# EAGLE board Qwiic_Pocket_Dev_ESP32_C6-Panel (EAGLE 9.6.2), part 1 of 5
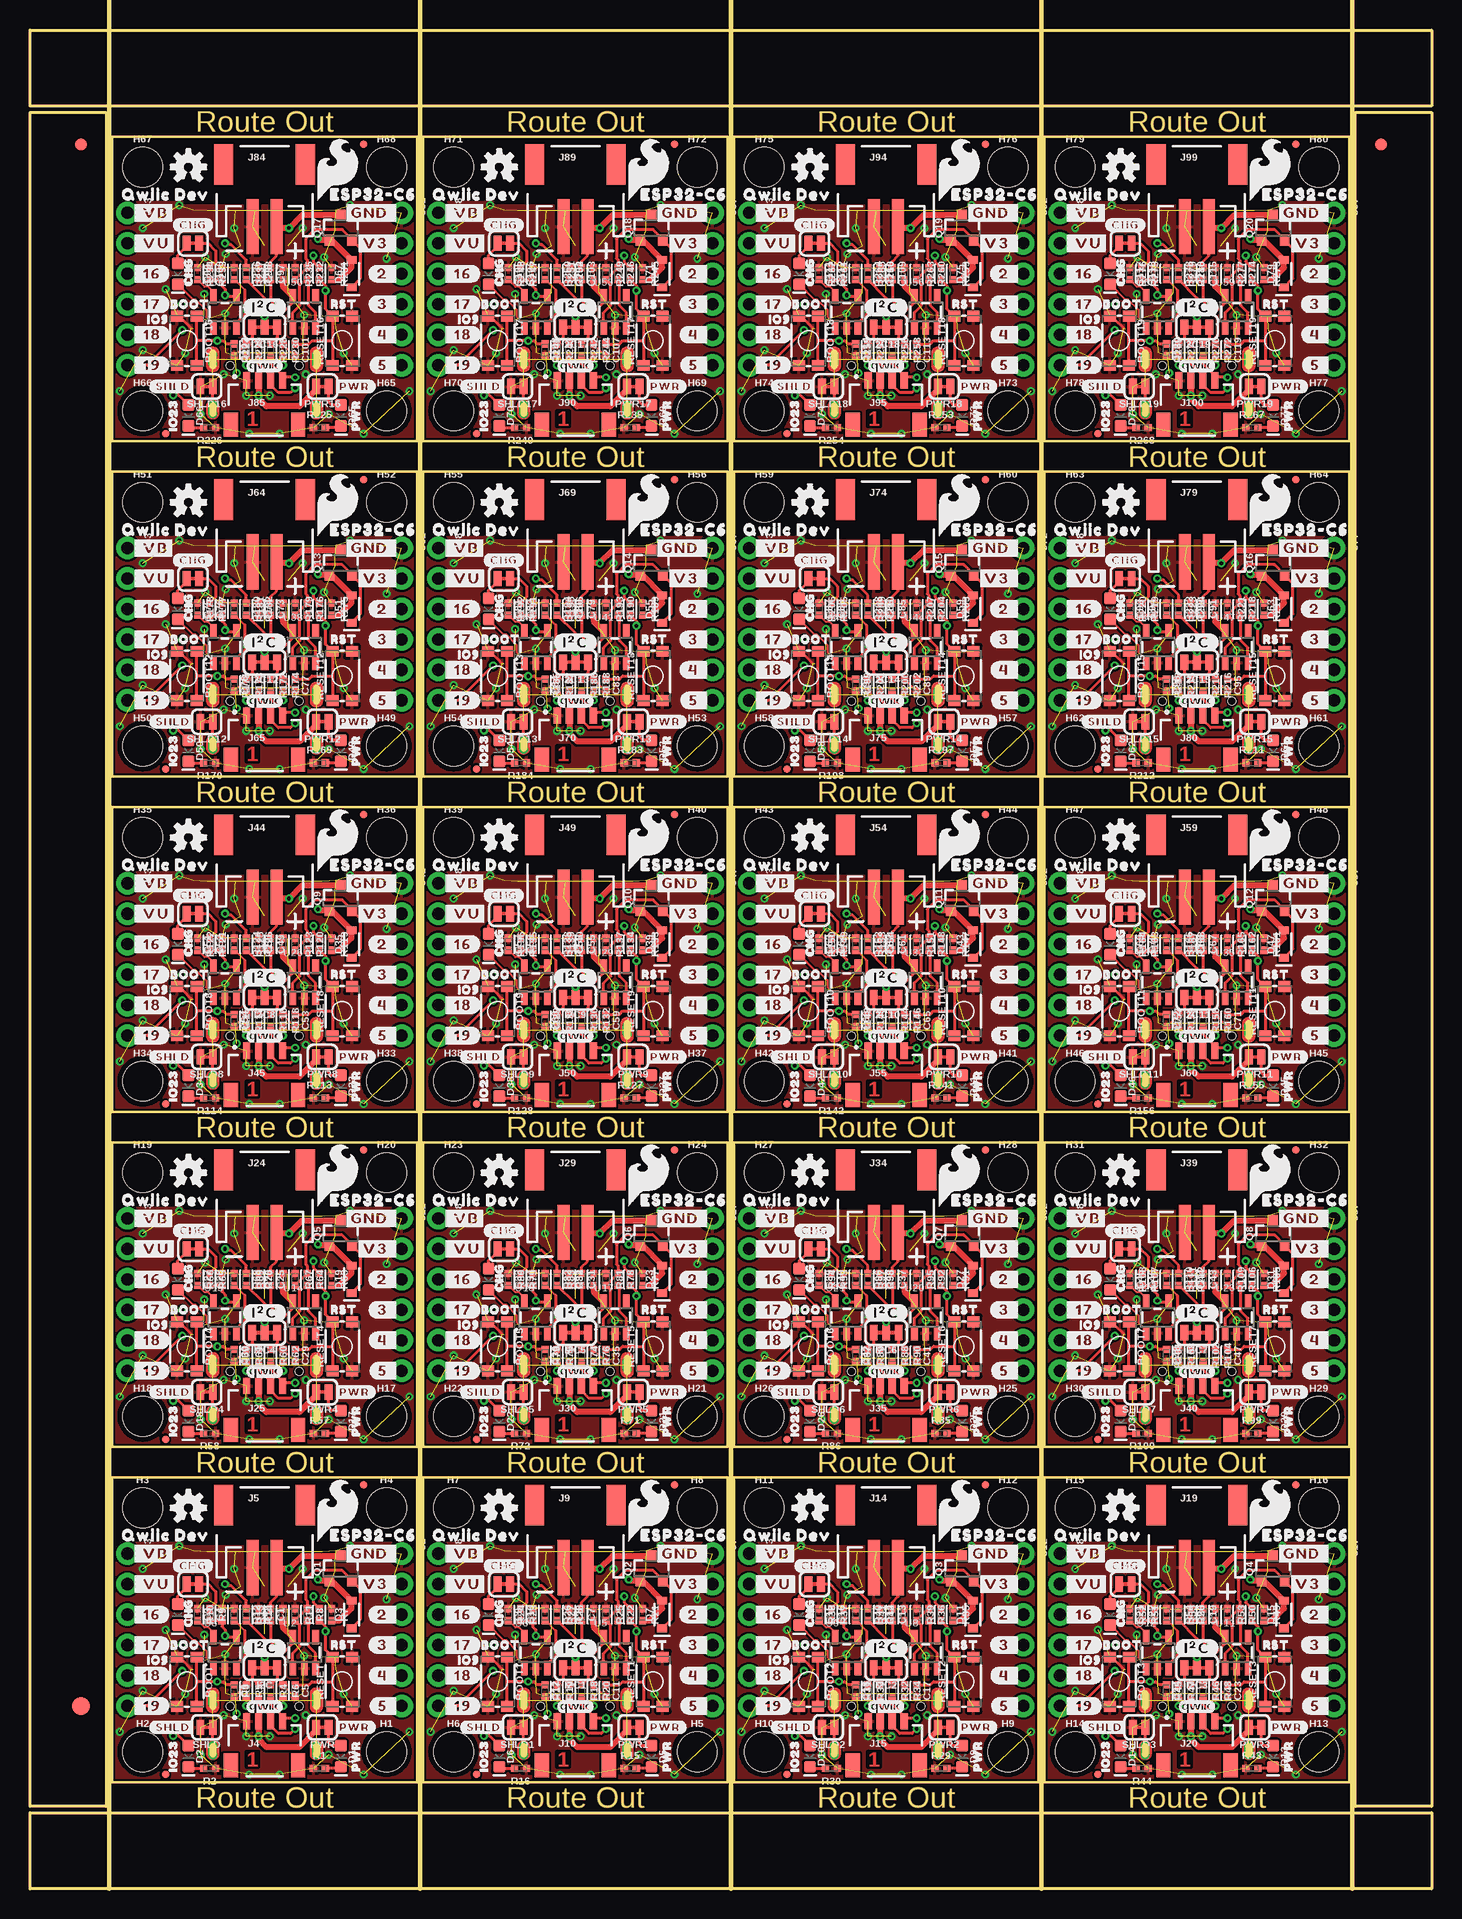
[diagram p0: board, top side]
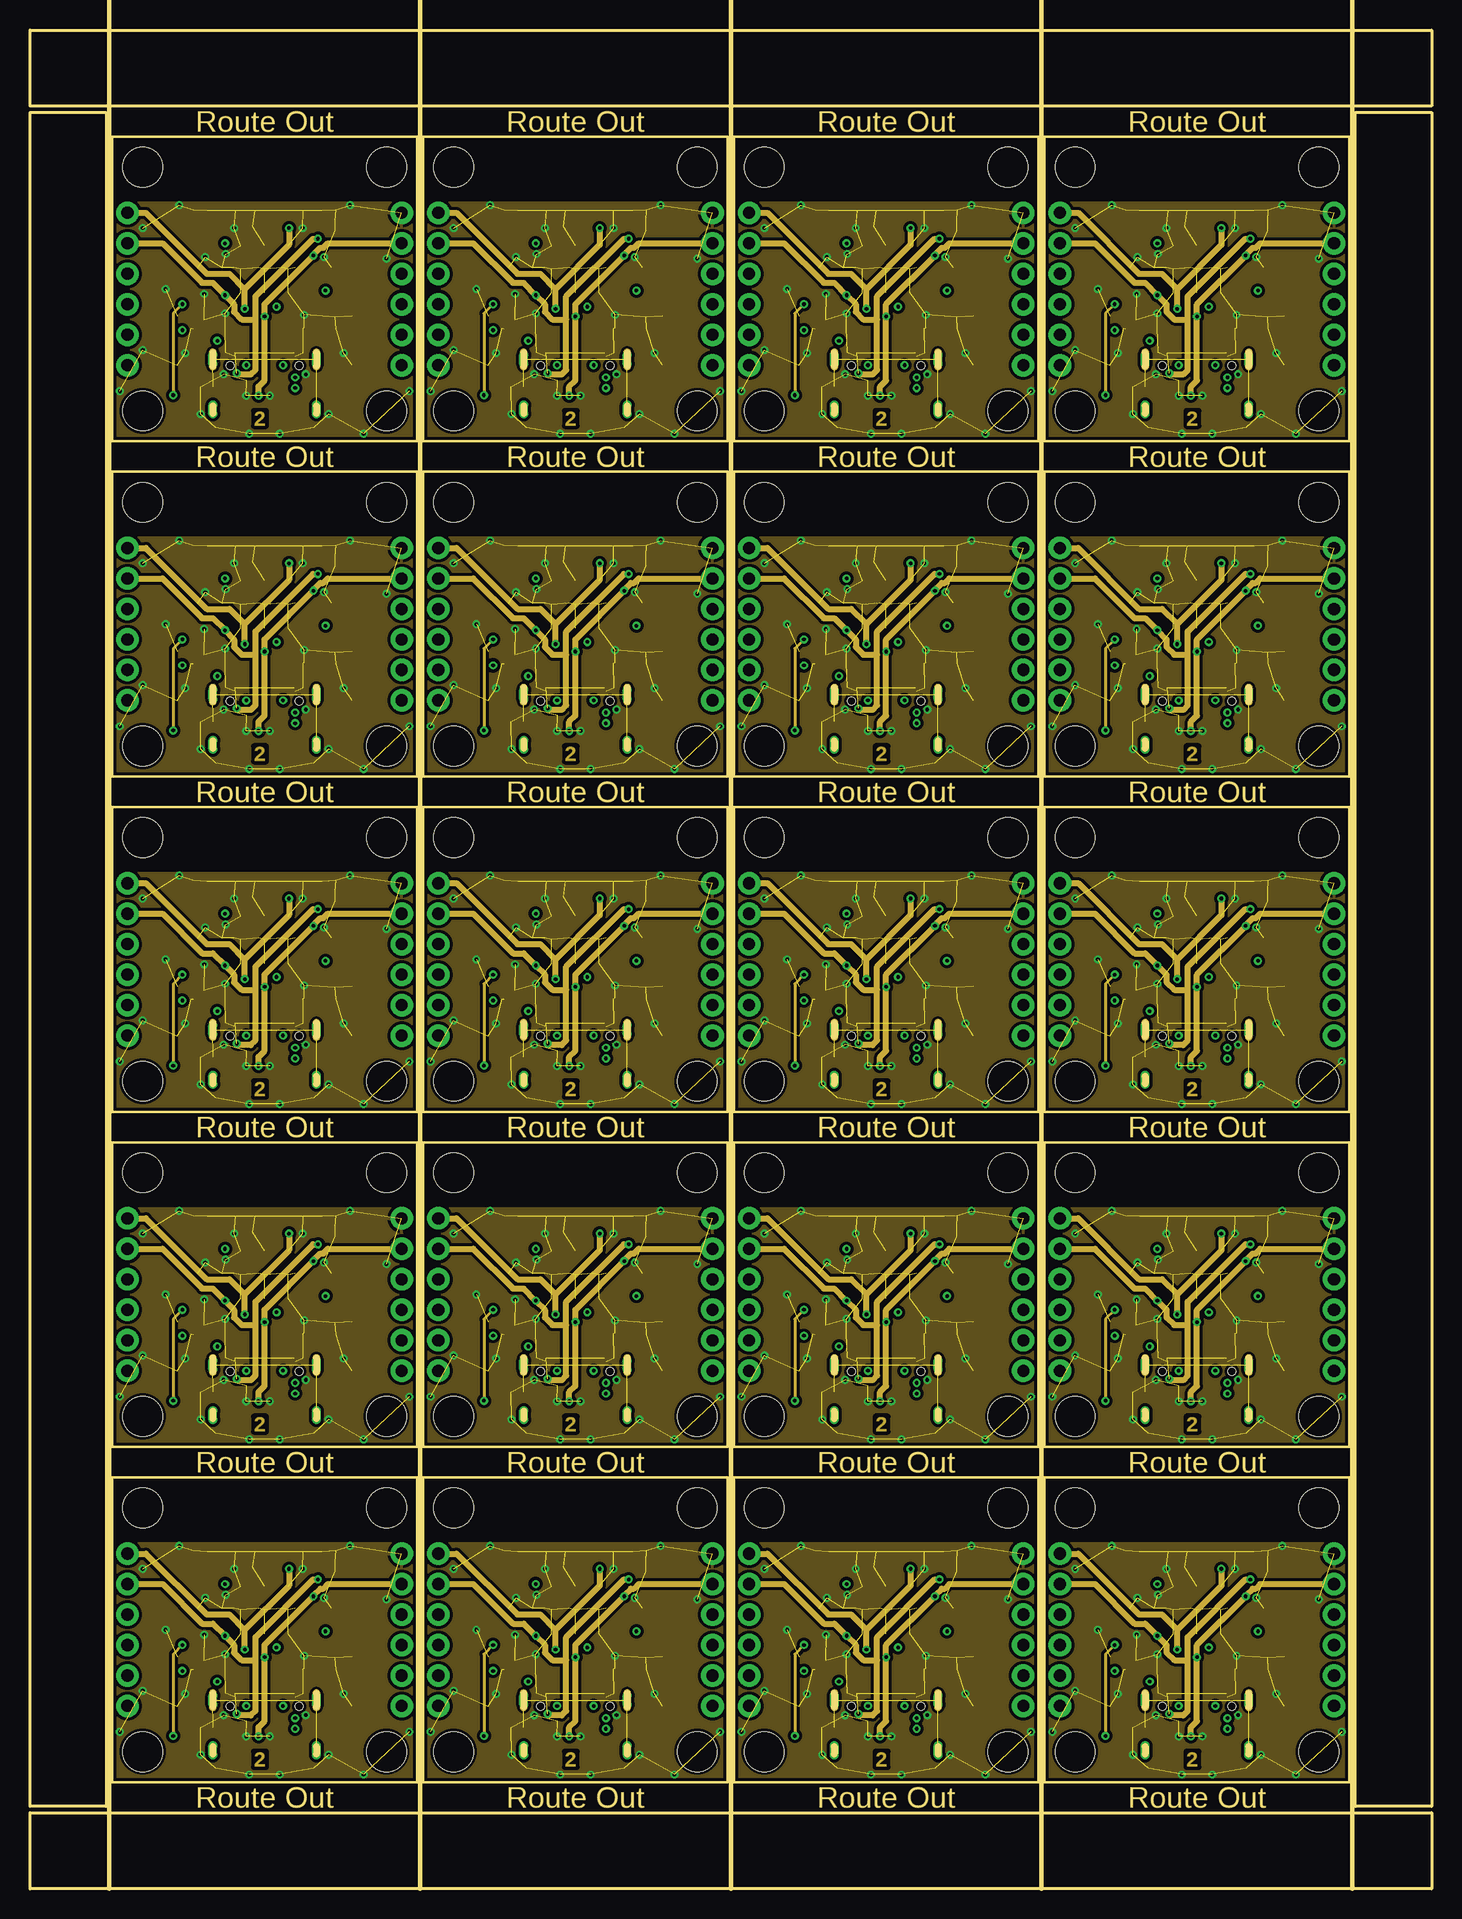
[diagram p1: board, inner layer Route2]
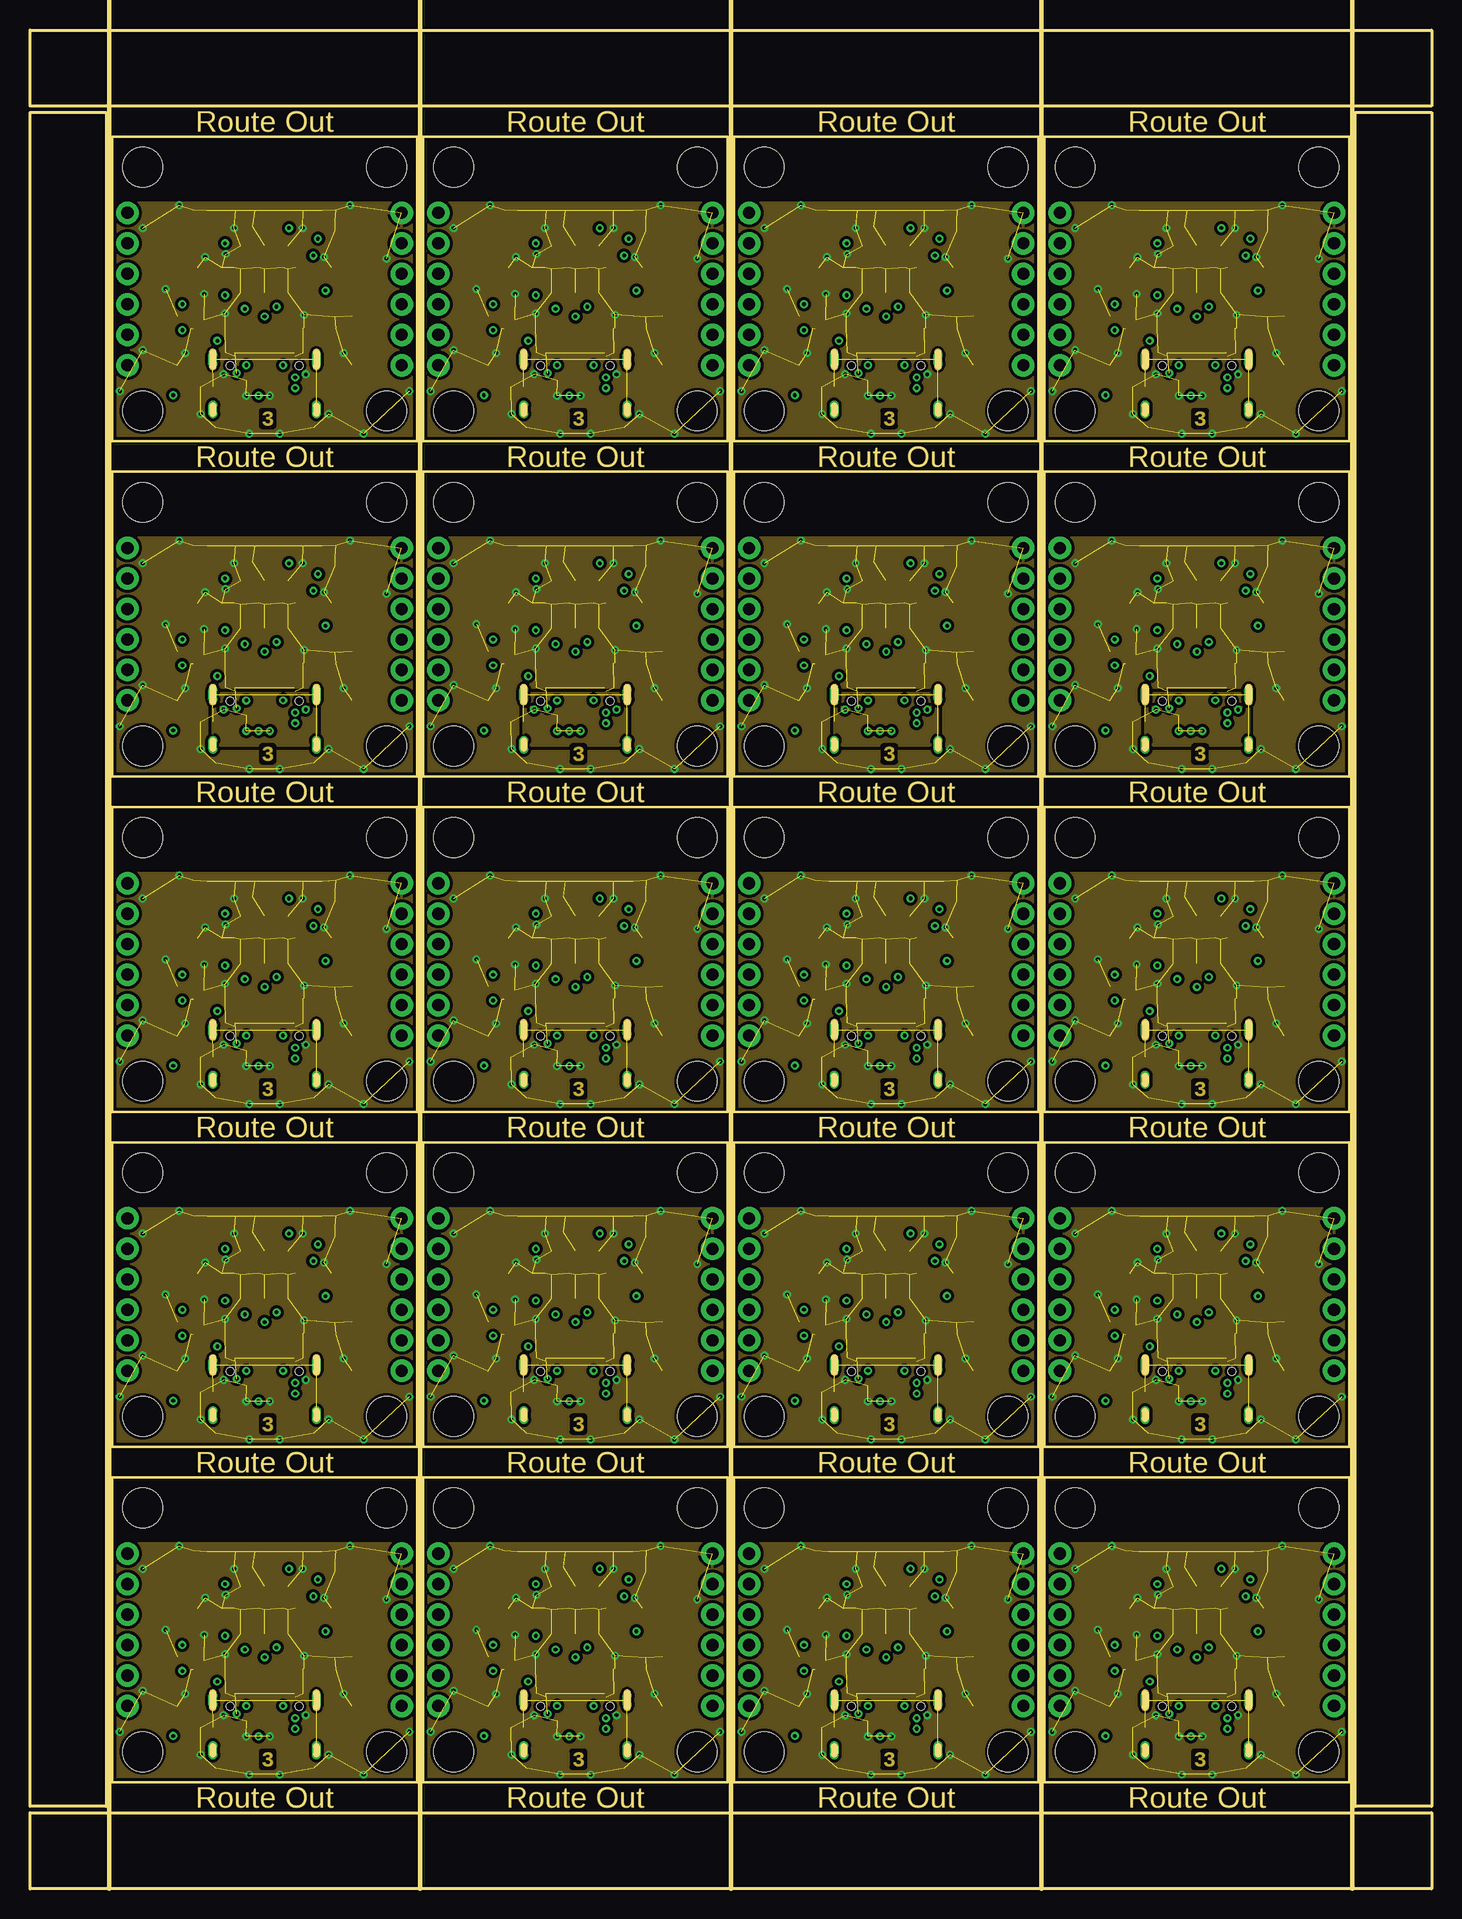
[diagram p2: board, inner layer Route15]
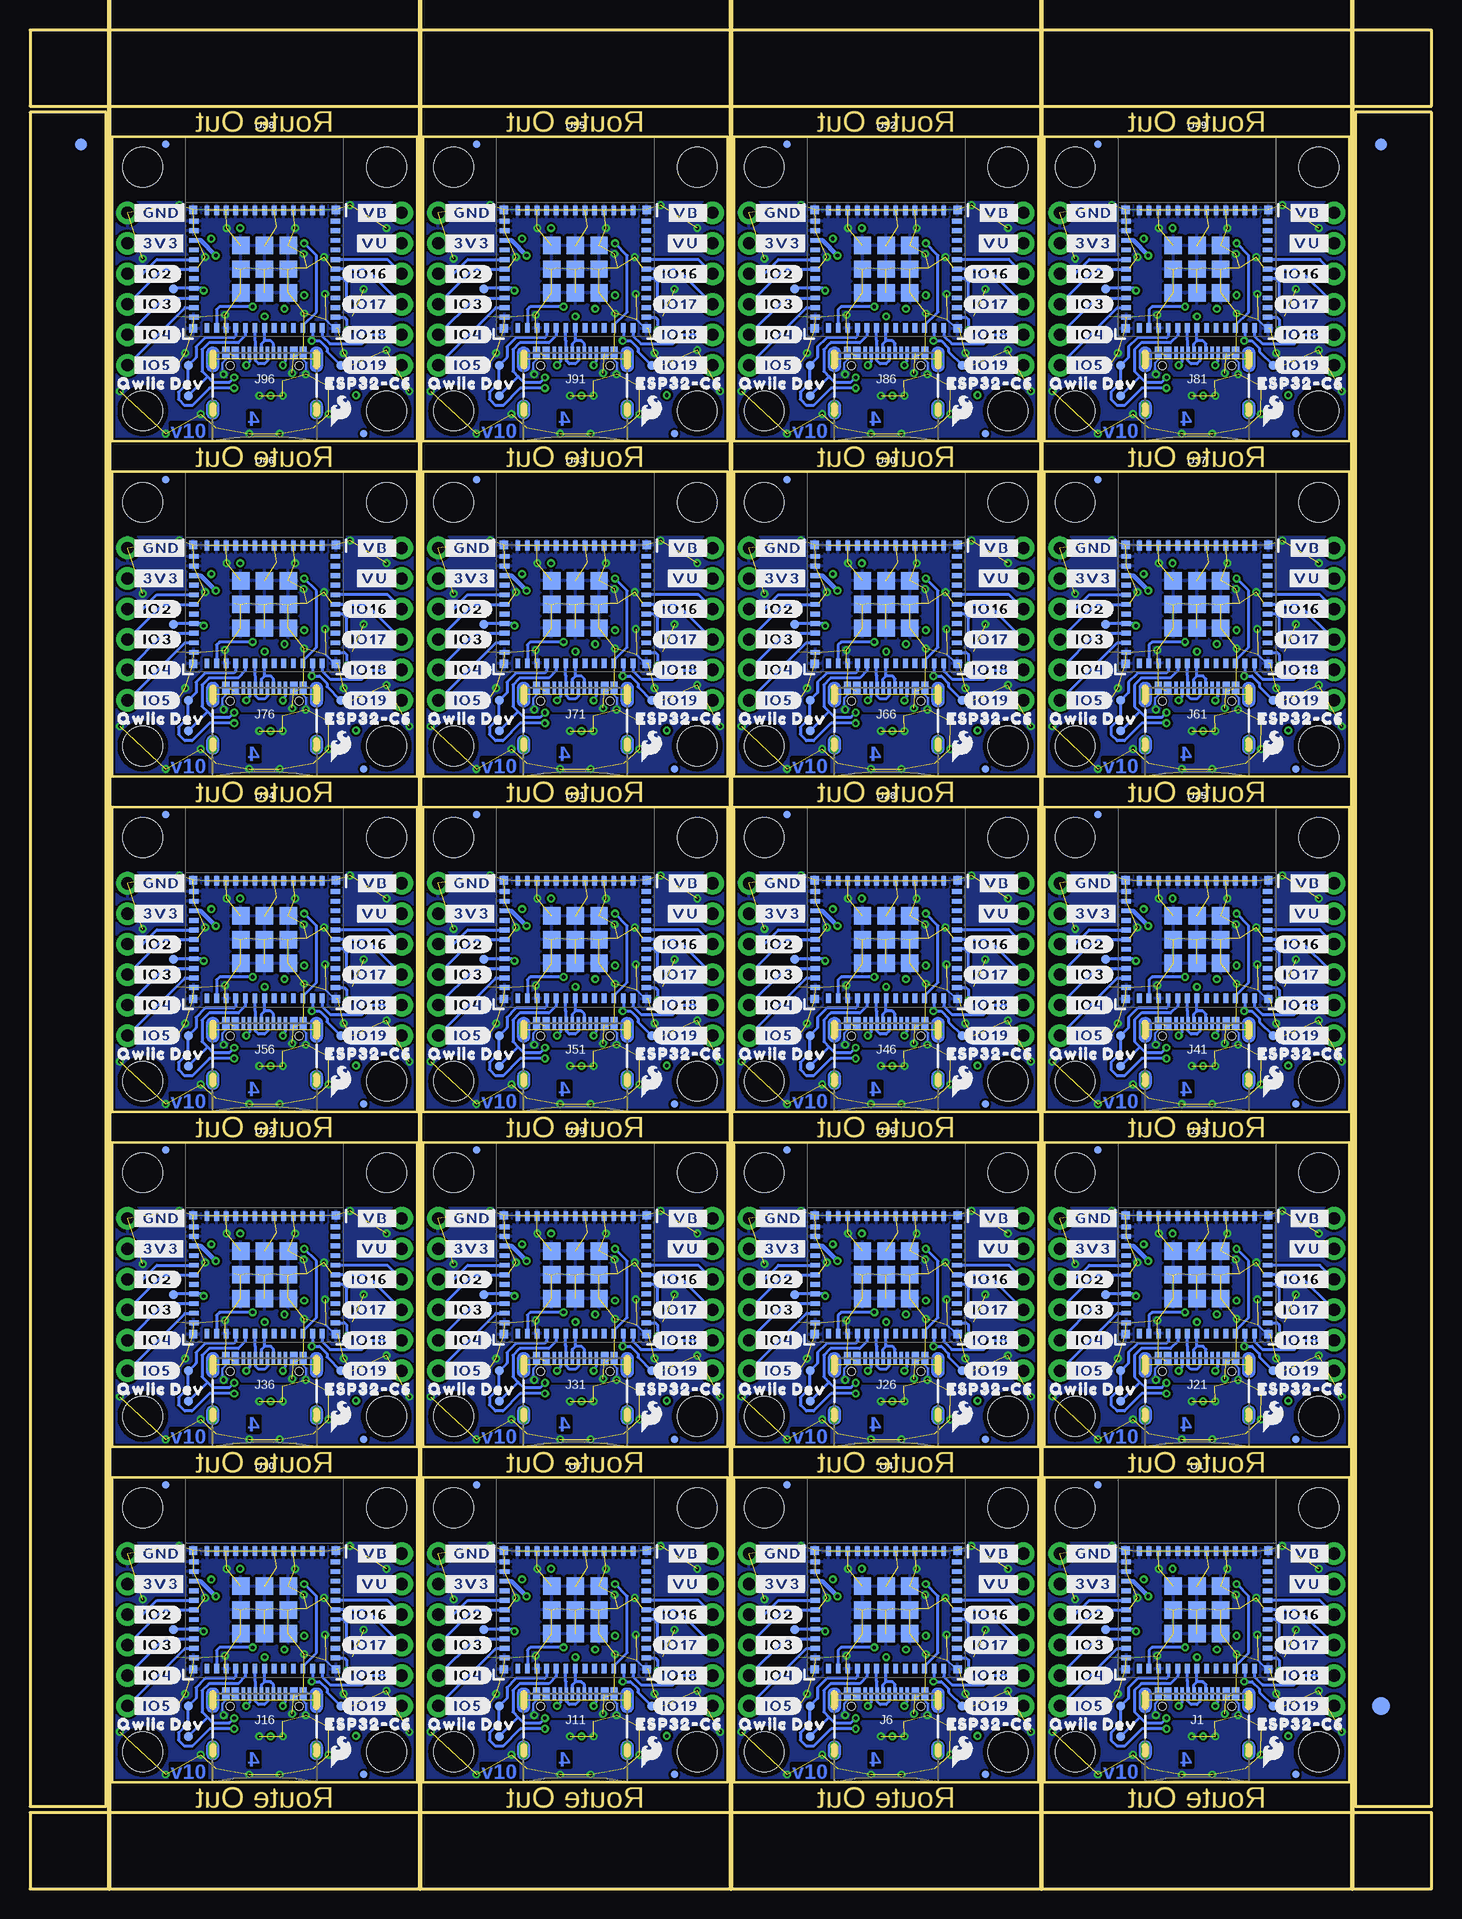
[diagram p3: board, bottom side, seen from below]

Size 116.84 x 154.94 mm. Coordinates in mm from the lower left corner, seen from the top.
Outline: 6.86,8.89 32.26,8.89 32.26,34.29 6.86,34.29 6.86,8.89
Outline: 32.77,8.89 58.17,8.89 58.17,34.29 32.77,34.29 32.77,8.89
Outline: 58.67,8.89 84.07,8.89 84.07,34.29 58.67,34.29 58.67,8.89
Outline: 84.58,8.89 109.98,8.89 109.98,34.29 84.58,34.29 84.58,8.89
Outline: 6.86,36.83 32.26,36.83 32.26,62.23 6.86,62.23 6.86,36.83
Outline: 32.77,36.83 58.17,36.83 58.17,62.23 32.77,62.23 32.77,36.83
Outline: 58.67,36.83 84.07,36.83 84.07,62.23 58.67,62.23 58.67,36.83
Outline: 84.58,36.83 109.98,36.83 109.98,62.23 84.58,62.23 84.58,36.83
Outline: 6.86,64.77 32.26,64.77 32.26,90.17 6.86,90.17 6.86,64.77
Outline: 32.77,64.77 58.17,64.77 58.17,90.17 32.77,90.17 32.77,64.77
Outline: 58.67,64.77 84.07,64.77 84.07,90.17 58.67,90.17 58.67,64.77
Outline: 84.58,64.77 109.98,64.77 109.98,90.17 84.58,90.17 84.58,64.77
Outline: 6.86,92.71 32.26,92.71 32.26,118.11 6.86,118.11 6.86,92.71
Outline: 32.77,92.71 58.17,92.71 58.17,118.11 32.77,118.11 32.77,92.71
Outline: 58.67,92.71 84.07,92.71 84.07,118.11 58.67,118.11 58.67,92.71
Outline: 84.58,92.71 109.98,92.71 109.98,118.11 84.58,118.11 84.58,92.71
Outline: 6.86,120.65 32.26,120.65 32.26,146.05 6.86,146.05 6.86,120.65
Outline: 32.77,120.65 58.17,120.65 58.17,146.05 32.77,146.05 32.77,120.65
Outline: 58.67,120.65 84.07,120.65 84.07,146.05 58.67,146.05 58.67,120.65
Outline: 84.58,120.65 109.98,120.65 109.98,146.05 84.58,146.05 84.58,120.65
Outline: 0,6.35 116.84,6.35 116.84,0 0,0 0,6.35
Outline: 110.49,148.08 116.84,148.08 116.84,6.86 110.49,6.86 110.49,148.08
Outline: 0,154.94 116.84,154.94 116.84,148.59 0,148.59 0,154.94
Outline: 0,148.08 6.35,148.08 6.35,6.86 0,6.86 0,148.08
Copper layers (1+2*15+16): Top 0.035559375mm / dielectric 0.47751875mm / Route2 0.035559375mm / dielectric 0.47751875mm / Route15 0.035559375mm / dielectric 0.47751875mm / Bottom 0.035559375mm
Design rules "Qwiic_Pocket_Dev_ESP32_C6": minimum track width 7mil, minimum drill 12mil, track to track 7mil, track to pad 7mil, pad to pad 7mil, via to via 7mil, smd to smd 7mil, copper to edge 7mil, drill to drill 7mil, minimum pad ring 7mil, minimum via ring 7mil, stop-mask expansion 3mil, vias tented up to drill 25mil, thermal gap 10mil
tRestrict: area 25.9,28.4 to 26.2,28.7; area 51.8,28.4 to 52.1,28.7; area 77.7,28.4 to 78,28.7; area 103.6,28.4 to 103.9,28.7; area 25.9,56.4 to 26.2,56.6; area 51.8,56.4 to 52.1,56.6; area 77.7,56.4 to 78,56.6; area 103.6,56.4 to 103.9,56.6; area 25.9,84.3 to 26.2,84.6; area 51.8,84.3 to 52.1,84.6; area 77.7,84.3 to 78,84.6; area 103.6,84.3 to 103.9,84.6; area 25.9,112.3 to 26.2,112.5; area 51.8,112.3 to 52.1,112.5; area 77.7,112.3 to 78,112.5; area 103.6,112.3 to 103.9,112.5; area 25.9,140.2 to 26.2,140.5; area 51.8,140.2 to 52.1,140.5; area 77.7,140.2 to 78,140.5; area 103.6,140.2 to 103.9,140.5
bRestrict: area 16.3,17 to 16.5,17.3; area 42.2,17 to 42.4,17.3; area 68.1,17 to 68.3,17.3; area 94,17 to 94.2,17.3; area 16.3,45 to 16.5,45.2; area 42.2,45 to 42.4,45.2; area 68.1,45 to 68.3,45.2; area 94,45 to 94.2,45.2; area 16.3,72.9 to 16.5,73.2; area 42.2,72.9 to 42.4,73.2; area 68.1,72.9 to 68.3,73.2; area 94,72.9 to 94.2,73.2; area 16.3,100.8 to 16.5,101.1; area 42.2,100.8 to 42.4,101.1; area 68.1,100.8 to 68.3,101.1; area 94,100.8 to 94.2,101.1; area 16.3,128.8 to 16.5,129; area 42.2,128.8 to 42.4,129; area 68.1,128.8 to 68.3,129; area 94,128.8 to 94.2,129
Milling: 5 lines

## Footprints (pad centres in the part's own frame; a part is rotated, then mirrored left to right if it is on the bottom)
TACTILE_SWITCH_SMD_4.6X2.8MM = smd 0.9 x 1: 1 -2.05,-0.8; 2 2.05,-0.8; 3 2.05,0.8; 4 -2.05,0.8
0402-TIGHT = smd 0.6 x 0.6: 1 -0.5,0; 2 0.5,0
SMT-JUMPER_2_NC_TRACE_SILK = smd 0.66 x 1.27: 1 -0.521,0; 2 0.521,0
LED-0603 = smd 1 x 1: A -0.877,0; C 0.877,0
SOD-323 = smd 0.63 x 0.83: A 1.15,0; C -1.15,0
FIDUCIAL-1X2 = smd 1 x 1: 1 0,0
FIDUCIAL-1.5X3 = smd 1.5 x 1.5: 1 0,0
FIDUCIAL-MICRO = smd 0.635 x 0.635: 1 0,0
STAND-OFF = hole 3.302: 0,0
SMT-JUMPER_3_2-NC_TRACE_SILK = smd 0.66 x 1.27: 1 -1.041,0; 2 0,0; 3 1.041,0
USB-C-16P_4LAYER-PADS = smd 0.3 x 1: A5 -1.25,-0.34; A6 -0.25,-0.34; A7 0.25,-0.34; A8 1.25,-0.34; B5 1.75,-0.34; B6 0.75,-0.34; B7 -0.75,-0.34; B8 -1.75,-0.34 | smd 0.6 x 1: GND -3.225,-0.34; GND2 3.225,-0.34; VBUS1 -2.45,-0.34; VBUS2 2.45,-0.34 | drill 0.4 pad 0.6 long: SHLD1 -4.318,-0.915; SHLD2 4.318,-0.915; SHLD3 -4.318,-5.095; SHLD4 4.318,-5.095 | hole 0.65: -2.89,-1.445; 2.89,-1.445
1X06_NO_SILK = drill 1.016 pad 1.88: 1 0,0; 2 2.54,0; 3 5.08,0; 4 7.62,0; 5 10.16,0; 6 12.7,0
JST04_1MM_RA = smd 0.6 x 1.35: 1 -1.5,0; 2 -0.5,0; 3 0.5,0; 4 1.5,0 | smd 1.2 x 2: NC1 2.8,-3.675; NC2 -2.8,-3.675
JST-2-SMD = smd 1 x 4.6: 1 -1,-3.7; 2 1,-3.7 | smd 1.6 x 3.4: NC1 -3.4,1.5; NC2 3.4,1.5
SOT23-3 = smd 0.8 x 0.9: 1 -0.95,-1; 2 0.95,-1; 3 0,1.1
PAD.03X.03 = smd 0.762 x 0.762: 1 0,0
ESP32-C6-MINI-1 = smd 0.8 x 0.4: 1 -5.9,4; 2 -5.9,3.2; 3 -5.9,2.4; 4 -5.9,1.6; 5 -5.9,0.8; 6 -5.9,0; 7 -5.9,-0.8; 8 -5.9,-1.6; 9 -5.9,-2.4; 10 -5.9,-3.2; 11 -5.9,-4; 25 5.9,-4; 26 5.9,-3.2; 27 5.9,-2.4; 28 5.9,-1.6; 29 5.9,-0.8; 30 5.9,0; 31 5.9,0.8; 32 5.9,1.6; 33 5.9,2.4; 34 5.9,3.2; 35 5.9,4 | smd 0.4 x 0.8: 12 -4.8,-4.9; 13 -4,-4.9; 14 -3.2,-4.9; 15 -2.4,-4.9; 16 -1.6,-4.9; 17 -0.8,-4.9; 18 0,-4.9; 19 0.8,-4.9; 20 1.6,-4.9; 21 2.4,-4.9; 22 3.2,-4.9; 23 4,-4.9; 24 4.8,-4.9; 36 4.8,4.9; 37 4,4.9; 38 3.2,4.9; 39 2.4,4.9; 40 1.6,4.9; 41 0.8,4.9; 42 0,4.9; 43 -0.8,4.9; 44 -1.6,4.9; 45 -2.4,4.9; 46 -3.2,4.9; 47 -4,4.9; 48 -4.8,4.9 | smd 1.45 x 1.45: 49.1 -1.975,1.975; 49.2 -1.975,0; 49.3 -1.975,-1.975; 49.4 0,-1.975; 49.5 1.975,-1.975; 49.6 1.975,0; 49.7 1.975,1.975; 49.8 0,1.975; 49.9 0,0 | smd 0.7 x 0.7: 50 5.95,4.95; 51 5.95,-4.95; 52 -5.95,-4.95; 53 -5.95,4.95
SOT23-5 = smd 0.55 x 1.2: 1 -0.95,-1.3; 2 0,-1.3; 3 0.95,-1.3; 4 0.95,1.3; 5 -0.95,1.3

## Placement (x,y rotation side)
BOOT  MOMENTARY-SWITCH-SPST-SMD-4.6X2.8MM  [TACTILE_SWITCH_SMD_4.6X2.8MM]  13.08,17.27 270 top
BOOT1  MOMENTARY-SWITCH-SPST-SMD-4.6X2.8MM  [TACTILE_SWITCH_SMD_4.6X2.8MM]  38.99,17.27 270 top
BOOT2  MOMENTARY-SWITCH-SPST-SMD-4.6X2.8MM  [TACTILE_SWITCH_SMD_4.6X2.8MM]  64.9,17.27 270 top
BOOT3  MOMENTARY-SWITCH-SPST-SMD-4.6X2.8MM  [TACTILE_SWITCH_SMD_4.6X2.8MM]  90.81,17.27 270 top
BOOT4  MOMENTARY-SWITCH-SPST-SMD-4.6X2.8MM  [TACTILE_SWITCH_SMD_4.6X2.8MM]  13.08,45.21 270 top
BOOT5  MOMENTARY-SWITCH-SPST-SMD-4.6X2.8MM  [TACTILE_SWITCH_SMD_4.6X2.8MM]  38.99,45.21 270 top
BOOT6  MOMENTARY-SWITCH-SPST-SMD-4.6X2.8MM  [TACTILE_SWITCH_SMD_4.6X2.8MM]  64.9,45.21 270 top
BOOT7  MOMENTARY-SWITCH-SPST-SMD-4.6X2.8MM  [TACTILE_SWITCH_SMD_4.6X2.8MM]  90.81,45.21 270 top
BOOT8  MOMENTARY-SWITCH-SPST-SMD-4.6X2.8MM  [TACTILE_SWITCH_SMD_4.6X2.8MM]  13.08,73.15 270 top
BOOT9  MOMENTARY-SWITCH-SPST-SMD-4.6X2.8MM  [TACTILE_SWITCH_SMD_4.6X2.8MM]  38.99,73.15 270 top
BOOT10  MOMENTARY-SWITCH-SPST-SMD-4.6X2.8MM  [TACTILE_SWITCH_SMD_4.6X2.8MM]  64.9,73.15 270 top
BOOT11  MOMENTARY-SWITCH-SPST-SMD-4.6X2.8MM  [TACTILE_SWITCH_SMD_4.6X2.8MM]  90.81,73.15 270 top
BOOT12  MOMENTARY-SWITCH-SPST-SMD-4.6X2.8MM  [TACTILE_SWITCH_SMD_4.6X2.8MM]  13.08,101.09 270 top
BOOT13  MOMENTARY-SWITCH-SPST-SMD-4.6X2.8MM  [TACTILE_SWITCH_SMD_4.6X2.8MM]  38.99,101.09 270 top
BOOT14  MOMENTARY-SWITCH-SPST-SMD-4.6X2.8MM  [TACTILE_SWITCH_SMD_4.6X2.8MM]  64.9,101.09 270 top
BOOT15  MOMENTARY-SWITCH-SPST-SMD-4.6X2.8MM  [TACTILE_SWITCH_SMD_4.6X2.8MM]  90.81,101.09 270 top
BOOT16  MOMENTARY-SWITCH-SPST-SMD-4.6X2.8MM  [TACTILE_SWITCH_SMD_4.6X2.8MM]  13.08,129.03 270 top
BOOT17  MOMENTARY-SWITCH-SPST-SMD-4.6X2.8MM  [TACTILE_SWITCH_SMD_4.6X2.8MM]  38.99,129.03 270 top
BOOT18  MOMENTARY-SWITCH-SPST-SMD-4.6X2.8MM  [TACTILE_SWITCH_SMD_4.6X2.8MM]  64.9,129.03 270 top
BOOT19  MOMENTARY-SWITCH-SPST-SMD-4.6X2.8MM  [TACTILE_SWITCH_SMD_4.6X2.8MM]  90.81,129.03 270 top
C1  2.2uF  [0402-TIGHT]  22.1,22.86 90 top
C2  2.2uF  [0402-TIGHT]  21.08,22.86 90 top
C3  2.2uF  [0402-TIGHT]  16,22.86 90 top
C4  2.2uF  [0402-TIGHT]  17.02,22.86 90 top
C5  0.1uF  [0402-TIGHT]  22.1,16.51 270 top
C6  DNP  [0402-TIGHT]  17.02,16.51 270 top
C7  2.2uF  [0402-TIGHT]  48.01,22.86 90 top
C8  2.2uF  [0402-TIGHT]  46.99,22.86 90 top
C9  2.2uF  [0402-TIGHT]  41.91,22.86 90 top
C10  2.2uF  [0402-TIGHT]  42.93,22.86 90 top
C11  0.1uF  [0402-TIGHT]  48.01,16.51 270 top
C12  DNP  [0402-TIGHT]  42.93,16.51 270 top
C13  2.2uF  [0402-TIGHT]  73.91,22.86 90 top
C14  2.2uF  [0402-TIGHT]  72.9,22.86 90 top
C15  2.2uF  [0402-TIGHT]  67.82,22.86 90 top
C16  2.2uF  [0402-TIGHT]  68.83,22.86 90 top
C17  0.1uF  [0402-TIGHT]  73.91,16.51 270 top
C18  DNP  [0402-TIGHT]  68.83,16.51 270 top
C19  2.2uF  [0402-TIGHT]  99.82,22.86 90 top
C20  2.2uF  [0402-TIGHT]  98.81,22.86 90 top
C21  2.2uF  [0402-TIGHT]  93.73,22.86 90 top
C22  2.2uF  [0402-TIGHT]  94.74,22.86 90 top
C23  0.1uF  [0402-TIGHT]  99.82,16.51 270 top
C24  DNP  [0402-TIGHT]  94.74,16.51 270 top
C25  2.2uF  [0402-TIGHT]  22.1,50.8 90 top
C26  2.2uF  [0402-TIGHT]  21.08,50.8 90 top
C27  2.2uF  [0402-TIGHT]  16,50.8 90 top
C28  2.2uF  [0402-TIGHT]  17.02,50.8 90 top
C29  0.1uF  [0402-TIGHT]  22.1,44.45 270 top
C30  DNP  [0402-TIGHT]  17.02,44.45 270 top
C31  2.2uF  [0402-TIGHT]  48.01,50.8 90 top
C32  2.2uF  [0402-TIGHT]  46.99,50.8 90 top
C33  2.2uF  [0402-TIGHT]  41.91,50.8 90 top
C34  2.2uF  [0402-TIGHT]  42.93,50.8 90 top
C35  0.1uF  [0402-TIGHT]  48.01,44.45 270 top
C36  DNP  [0402-TIGHT]  42.93,44.45 270 top
C37  2.2uF  [0402-TIGHT]  73.91,50.8 90 top
C38  2.2uF  [0402-TIGHT]  72.9,50.8 90 top
C39  2.2uF  [0402-TIGHT]  67.82,50.8 90 top
C40  2.2uF  [0402-TIGHT]  68.83,50.8 90 top
C41  0.1uF  [0402-TIGHT]  73.91,44.45 270 top
C42  DNP  [0402-TIGHT]  68.83,44.45 270 top
C43  2.2uF  [0402-TIGHT]  99.82,50.8 90 top
C44  2.2uF  [0402-TIGHT]  98.81,50.8 90 top
C45  2.2uF  [0402-TIGHT]  93.73,50.8 90 top
C46  2.2uF  [0402-TIGHT]  94.74,50.8 90 top
C47  0.1uF  [0402-TIGHT]  99.82,44.45 270 top
C48  DNP  [0402-TIGHT]  94.74,44.45 270 top
C49  2.2uF  [0402-TIGHT]  22.1,78.74 90 top
C50  2.2uF  [0402-TIGHT]  21.08,78.74 90 top
C51  2.2uF  [0402-TIGHT]  16,78.74 90 top
C52  2.2uF  [0402-TIGHT]  17.02,78.74 90 top
C53  0.1uF  [0402-TIGHT]  22.1,72.39 270 top
C54  DNP  [0402-TIGHT]  17.02,72.39 270 top
C55  2.2uF  [0402-TIGHT]  48.01,78.74 90 top
C56  2.2uF  [0402-TIGHT]  46.99,78.74 90 top
C57  2.2uF  [0402-TIGHT]  41.91,78.74 90 top
C58  2.2uF  [0402-TIGHT]  42.93,78.74 90 top
C59  0.1uF  [0402-TIGHT]  48.01,72.39 270 top
C60  DNP  [0402-TIGHT]  42.93,72.39 270 top
C61  2.2uF  [0402-TIGHT]  73.91,78.74 90 top
C62  2.2uF  [0402-TIGHT]  72.9,78.74 90 top
C63  2.2uF  [0402-TIGHT]  67.82,78.74 90 top
C64  2.2uF  [0402-TIGHT]  68.83,78.74 90 top
C65  0.1uF  [0402-TIGHT]  73.91,72.39 270 top
C66  DNP  [0402-TIGHT]  68.83,72.39 270 top
C67  2.2uF  [0402-TIGHT]  99.82,78.74 90 top
C68  2.2uF  [0402-TIGHT]  98.81,78.74 90 top
C69  2.2uF  [0402-TIGHT]  93.73,78.74 90 top
C70  2.2uF  [0402-TIGHT]  94.74,78.74 90 top
C71  0.1uF  [0402-TIGHT]  99.82,72.39 270 top
C72  DNP  [0402-TIGHT]  94.74,72.39 270 top
C73  2.2uF  [0402-TIGHT]  22.1,106.68 90 top
C74  2.2uF  [0402-TIGHT]  21.08,106.68 90 top
C75  2.2uF  [0402-TIGHT]  16,106.68 90 top
C76  2.2uF  [0402-TIGHT]  17.02,106.68 90 top
C77  0.1uF  [0402-TIGHT]  22.1,100.33 270 top
C78  DNP  [0402-TIGHT]  17.02,100.33 270 top
C79  2.2uF  [0402-TIGHT]  48.01,106.68 90 top
C80  2.2uF  [0402-TIGHT]  46.99,106.68 90 top
C81  2.2uF  [0402-TIGHT]  41.91,106.68 90 top
C82  2.2uF  [0402-TIGHT]  42.93,106.68 90 top
C83  0.1uF  [0402-TIGHT]  48.01,100.33 270 top
C84  DNP  [0402-TIGHT]  42.93,100.33 270 top
C85  2.2uF  [0402-TIGHT]  73.91,106.68 90 top
C86  2.2uF  [0402-TIGHT]  72.9,106.68 90 top
C87  2.2uF  [0402-TIGHT]  67.82,106.68 90 top
C88  2.2uF  [0402-TIGHT]  68.83,106.68 90 top
C89  0.1uF  [0402-TIGHT]  73.91,100.33 270 top
C90  DNP  [0402-TIGHT]  68.83,100.33 270 top
C91  2.2uF  [0402-TIGHT]  99.82,106.68 90 top
C92  2.2uF  [0402-TIGHT]  98.81,106.68 90 top
C93  2.2uF  [0402-TIGHT]  93.73,106.68 90 top
C94  2.2uF  [0402-TIGHT]  94.74,106.68 90 top
C95  0.1uF  [0402-TIGHT]  99.82,100.33 270 top
C96  DNP  [0402-TIGHT]  94.74,100.33 270 top
C97  2.2uF  [0402-TIGHT]  22.1,134.62 90 top
C98  2.2uF  [0402-TIGHT]  21.08,134.62 90 top
C99  2.2uF  [0402-TIGHT]  16,134.62 90 top
C100  2.2uF  [0402-TIGHT]  17.02,134.62 90 top
C101  0.1uF  [0402-TIGHT]  22.1,128.27 270 top
C102  DNP  [0402-TIGHT]  17.02,128.27 270 top
C103  2.2uF  [0402-TIGHT]  48.01,134.62 90 top
C104  2.2uF  [0402-TIGHT]  46.99,134.62 90 top
C105  2.2uF  [0402-TIGHT]  41.91,134.62 90 top
C106  2.2uF  [0402-TIGHT]  42.93,134.62 90 top
C107  0.1uF  [0402-TIGHT]  48.01,128.27 270 top
C108  DNP  [0402-TIGHT]  42.93,128.27 270 top
C109  2.2uF  [0402-TIGHT]  73.91,134.62 90 top
C110  2.2uF  [0402-TIGHT]  72.9,134.62 90 top
C111  2.2uF  [0402-TIGHT]  67.82,134.62 90 top
C112  2.2uF  [0402-TIGHT]  68.83,134.62 90 top
C113  0.1uF  [0402-TIGHT]  73.91,128.27 270 top
C114  DNP  [0402-TIGHT]  68.83,128.27 270 top
C115  2.2uF  [0402-TIGHT]  99.82,134.62 90 top
C116  2.2uF  [0402-TIGHT]  98.81,134.62 90 top
C117  2.2uF  [0402-TIGHT]  93.73,134.62 90 top
C118  2.2uF  [0402-TIGHT]  94.74,134.62 90 top
C119  0.1uF  [0402-TIGHT]  99.82,128.27 270 top
C120  DNP  [0402-TIGHT]  94.74,128.27 270 top
CHG  JUMPER-SMT_2_NC_TRACE_SILK  [SMT-JUMPER_2_NC_TRACE_SILK]  13.59,25.4 0 top
CHG1  JUMPER-SMT_2_NC_TRACE_SILK  [SMT-JUMPER_2_NC_TRACE_SILK]  39.5,25.4 0 top
CHG2  JUMPER-SMT_2_NC_TRACE_SILK  [SMT-JUMPER_2_NC_TRACE_SILK]  65.41,25.4 0 top
CHG3  JUMPER-SMT_2_NC_TRACE_SILK  [SMT-JUMPER_2_NC_TRACE_SILK]  91.31,25.4 0 top
CHG4  JUMPER-SMT_2_NC_TRACE_SILK  [SMT-JUMPER_2_NC_TRACE_SILK]  13.59,53.34 0 top
CHG5  JUMPER-SMT_2_NC_TRACE_SILK  [SMT-JUMPER_2_NC_TRACE_SILK]  39.5,53.34 0 top
CHG6  JUMPER-SMT_2_NC_TRACE_SILK  [SMT-JUMPER_2_NC_TRACE_SILK]  65.41,53.34 0 top
CHG7  JUMPER-SMT_2_NC_TRACE_SILK  [SMT-JUMPER_2_NC_TRACE_SILK]  91.31,53.34 0 top
CHG8  JUMPER-SMT_2_NC_TRACE_SILK  [SMT-JUMPER_2_NC_TRACE_SILK]  13.59,81.28 0 top
CHG9  JUMPER-SMT_2_NC_TRACE_SILK  [SMT-JUMPER_2_NC_TRACE_SILK]  39.5,81.28 0 top
CHG10  JUMPER-SMT_2_NC_TRACE_SILK  [SMT-JUMPER_2_NC_TRACE_SILK]  65.41,81.28 0 top
CHG11  JUMPER-SMT_2_NC_TRACE_SILK  [SMT-JUMPER_2_NC_TRACE_SILK]  91.31,81.28 0 top
CHG12  JUMPER-SMT_2_NC_TRACE_SILK  [SMT-JUMPER_2_NC_TRACE_SILK]  13.59,109.22 0 top
CHG13  JUMPER-SMT_2_NC_TRACE_SILK  [SMT-JUMPER_2_NC_TRACE_SILK]  39.5,109.22 0 top
CHG14  JUMPER-SMT_2_NC_TRACE_SILK  [SMT-JUMPER_2_NC_TRACE_SILK]  65.41,109.22 0 top
CHG15  JUMPER-SMT_2_NC_TRACE_SILK  [SMT-JUMPER_2_NC_TRACE_SILK]  91.31,109.22 0 top
CHG16  JUMPER-SMT_2_NC_TRACE_SILK  [SMT-JUMPER_2_NC_TRACE_SILK]  13.59,137.16 0 top
CHG17  JUMPER-SMT_2_NC_TRACE_SILK  [SMT-JUMPER_2_NC_TRACE_SILK]  39.5,137.16 0 top
CHG18  JUMPER-SMT_2_NC_TRACE_SILK  [SMT-JUMPER_2_NC_TRACE_SILK]  65.41,137.16 0 top
CHG19  JUMPER-SMT_2_NC_TRACE_SILK  [SMT-JUMPER_2_NC_TRACE_SILK]  91.31,137.16 0 top
D1  [LED-0603]  25.91,11.05 270 top
D2  BLUE  [LED-0603]  13.21,11.05 270 top
D3  1A/23V/620mV  [SOD-323]  26.8,22.86 90 top
D4  Yellow  [LED-0603]  12.32,22.86 270 top
D5  [LED-0603]  51.82,11.05 270 top
D6  BLUE  [LED-0603]  39.12,11.05 270 top
D7  1A/23V/620mV  [SOD-323]  52.7,22.86 90 top
D8  Yellow  [LED-0603]  38.23,22.86 270 top
D9  [LED-0603]  77.72,11.05 270 top
D10  BLUE  [LED-0603]  65.02,11.05 270 top
D11  1A/23V/620mV  [SOD-323]  78.61,22.86 90 top
D12  Yellow  [LED-0603]  64.14,22.86 270 top
D13  [LED-0603]  103.63,11.05 270 top
D14  BLUE  [LED-0603]  90.93,11.05 270 top
D15  1A/23V/620mV  [SOD-323]  104.52,22.86 90 top
D16  Yellow  [LED-0603]  90.04,22.86 270 top
D17  [LED-0603]  25.91,38.99 270 top
D18  BLUE  [LED-0603]  13.21,38.99 270 top
D19  1A/23V/620mV  [SOD-323]  26.8,50.8 90 top
D20  Yellow  [LED-0603]  12.32,50.8 270 top
D21  [LED-0603]  51.82,38.99 270 top
D22  BLUE  [LED-0603]  39.12,38.99 270 top
D23  1A/23V/620mV  [SOD-323]  52.7,50.8 90 top
D24  Yellow  [LED-0603]  38.23,50.8 270 top
D25  [LED-0603]  77.72,38.99 270 top
D26  BLUE  [LED-0603]  65.02,38.99 270 top
D27  1A/23V/620mV  [SOD-323]  78.61,50.8 90 top
D28  Yellow  [LED-0603]  64.14,50.8 270 top
D29  [LED-0603]  103.63,38.99 270 top
D30  BLUE  [LED-0603]  90.93,38.99 270 top
D31  1A/23V/620mV  [SOD-323]  104.52,50.8 90 top
D32  Yellow  [LED-0603]  90.04,50.8 270 top
D33  [LED-0603]  25.91,66.93 270 top
D34  BLUE  [LED-0603]  13.21,66.93 270 top
D35  1A/23V/620mV  [SOD-323]  26.8,78.74 90 top
D36  Yellow  [LED-0603]  12.32,78.74 270 top
D37  [LED-0603]  51.82,66.93 270 top
D38  BLUE  [LED-0603]  39.12,66.93 270 top
D39  1A/23V/620mV  [SOD-323]  52.7,78.74 90 top
D40  Yellow  [LED-0603]  38.23,78.74 270 top
D41  [LED-0603]  77.72,66.93 270 top
D42  BLUE  [LED-0603]  65.02,66.93 270 top
D43  1A/23V/620mV  [SOD-323]  78.61,78.74 90 top
D44  Yellow  [LED-0603]  64.14,78.74 270 top
D45  [LED-0603]  103.63,66.93 270 top
D46  BLUE  [LED-0603]  90.93,66.93 270 top
D47  1A/23V/620mV  [SOD-323]  104.52,78.74 90 top
D48  Yellow  [LED-0603]  90.04,78.74 270 top
D49  [LED-0603]  25.91,94.87 270 top
D50  BLUE  [LED-0603]  13.21,94.87 270 top
D51  1A/23V/620mV  [SOD-323]  26.8,106.68 90 top
D52  Yellow  [LED-0603]  12.32,106.68 270 top
D53  [LED-0603]  51.82,94.87 270 top
D54  BLUE  [LED-0603]  39.12,94.87 270 top
D55  1A/23V/620mV  [SOD-323]  52.7,106.68 90 top
D56  Yellow  [LED-0603]  38.23,106.68 270 top
D57  [LED-0603]  77.72,94.87 270 top
D58  BLUE  [LED-0603]  65.02,94.87 270 top
D59  1A/23V/620mV  [SOD-323]  78.61,106.68 90 top
D60  Yellow  [LED-0603]  64.14,106.68 270 top
D61  [LED-0603]  103.63,94.87 270 top
D62  BLUE  [LED-0603]  90.93,94.87 270 top
D63  1A/23V/620mV  [SOD-323]  104.52,106.68 90 top
D64  Yellow  [LED-0603]  90.04,106.68 270 top
D65  [LED-0603]  25.91,122.81 270 top
D66  BLUE  [LED-0603]  13.21,122.81 270 top
D67  1A/23V/620mV  [SOD-323]  26.8,134.62 90 top
D68  Yellow  [LED-0603]  12.32,134.62 270 top
D69  [LED-0603]  51.82,122.81 270 top
D70  BLUE  [LED-0603]  39.12,122.81 270 top
D71  1A/23V/620mV  [SOD-323]  52.7,134.62 90 top
D72  Yellow  [LED-0603]  38.23,134.62 270 top
D73  [LED-0603]  77.72,122.81 270 top
D74  BLUE  [LED-0603]  65.02,122.81 270 top
D75  1A/23V/620mV  [SOD-323]  78.61,134.62 90 top
D76  Yellow  [LED-0603]  64.14,134.62 270 top
D77  [LED-0603]  103.63,122.81 270 top
D78  BLUE  [LED-0603]  90.93,122.81 270 top
D79  1A/23V/620mV  [SOD-323]  104.52,134.62 90 top
D80  Yellow  [LED-0603]  90.04,134.62 270 top
E$1  [FIDUCIAL-1X2]  4.23,145.42 0 top
E$2  [FIDUCIAL-1X2]  4.23,145.42 0 bottom
E$3  [FIDUCIAL-1X2]  112.61,145.42 0 top
E$4  [FIDUCIAL-1X2]  112.61,145.42 0 bottom
E$5  [FIDUCIAL-1.5X3]  4.23,15.24 0 top
E$6  [FIDUCIAL-1.5X3]  4.23,15.24 0 bottom
FD1  FIDUCIALUFIDUCIAL  [FIDUCIAL-MICRO]  27.81,33.66 0 bottom
FD2  FIDUCIALUFIDUCIAL  [FIDUCIAL-MICRO]  27.81,33.66 0 top
FD3  FIDUCIALUFIDUCIAL  [FIDUCIAL-MICRO]  11.3,9.53 0 bottom
FD4  FIDUCIALUFIDUCIAL  [FIDUCIAL-MICRO]  11.3,9.53 0 top
FD5  FIDUCIALUFIDUCIAL  [FIDUCIAL-MICRO]  53.72,33.66 0 bottom
FD6  FIDUCIALUFIDUCIAL  [FIDUCIAL-MICRO]  53.72,33.66 0 top
FD7  FIDUCIALUFIDUCIAL  [FIDUCIAL-MICRO]  37.21,9.53 0 bottom
FD8  FIDUCIALUFIDUCIAL  [FIDUCIAL-MICRO]  37.21,9.53 0 top
FD9  FIDUCIALUFIDUCIAL  [FIDUCIAL-MICRO]  79.63,33.66 0 bottom
FD10  FIDUCIALUFIDUCIAL  [FIDUCIAL-MICRO]  79.63,33.66 0 top
FD11  FIDUCIALUFIDUCIAL  [FIDUCIAL-MICRO]  63.12,9.53 0 bottom
FD12  FIDUCIALUFIDUCIAL  [FIDUCIAL-MICRO]  63.12,9.53 0 top
FD13  FIDUCIALUFIDUCIAL  [FIDUCIAL-MICRO]  105.54,33.66 0 bottom
FD14  FIDUCIALUFIDUCIAL  [FIDUCIAL-MICRO]  105.54,33.66 0 top
FD15  FIDUCIALUFIDUCIAL  [FIDUCIAL-MICRO]  89.03,9.53 0 bottom
FD16  FIDUCIALUFIDUCIAL  [FIDUCIAL-MICRO]  89.03,9.53 0 top
FD17  FIDUCIALUFIDUCIAL  [FIDUCIAL-MICRO]  27.81,61.59 0 bottom
FD18  FIDUCIALUFIDUCIAL  [FIDUCIAL-MICRO]  27.81,61.59 0 top
FD19  FIDUCIALUFIDUCIAL  [FIDUCIAL-MICRO]  11.3,37.47 0 bottom
FD20  FIDUCIALUFIDUCIAL  [FIDUCIAL-MICRO]  11.3,37.47 0 top
FD21  FIDUCIALUFIDUCIAL  [FIDUCIAL-MICRO]  53.72,61.59 0 bottom
FD22  FIDUCIALUFIDUCIAL  [FIDUCIAL-MICRO]  53.72,61.59 0 top
FD23  FIDUCIALUFIDUCIAL  [FIDUCIAL-MICRO]  37.21,37.47 0 bottom
FD24  FIDUCIALUFIDUCIAL  [FIDUCIAL-MICRO]  37.21,37.47 0 top
FD25  FIDUCIALUFIDUCIAL  [FIDUCIAL-MICRO]  79.63,61.59 0 bottom
FD26  FIDUCIALUFIDUCIAL  [FIDUCIAL-MICRO]  79.63,61.59 0 top
FD27  FIDUCIALUFIDUCIAL  [FIDUCIAL-MICRO]  63.12,37.47 0 bottom
FD28  FIDUCIALUFIDUCIAL  [FIDUCIAL-MICRO]  63.12,37.47 0 top
FD29  FIDUCIALUFIDUCIAL  [FIDUCIAL-MICRO]  105.54,61.59 0 bottom
FD30  FIDUCIALUFIDUCIAL  [FIDUCIAL-MICRO]  105.54,61.59 0 top
FD31  FIDUCIALUFIDUCIAL  [FIDUCIAL-MICRO]  89.03,37.47 0 bottom
FD32  FIDUCIALUFIDUCIAL  [FIDUCIAL-MICRO]  89.03,37.47 0 top
FD33  FIDUCIALUFIDUCIAL  [FIDUCIAL-MICRO]  27.81,89.53 0 bottom
FD34  FIDUCIALUFIDUCIAL  [FIDUCIAL-MICRO]  27.81,89.53 0 top
FD35  FIDUCIALUFIDUCIAL  [FIDUCIAL-MICRO]  11.3,65.41 0 bottom
FD36  FIDUCIALUFIDUCIAL  [FIDUCIAL-MICRO]  11.3,65.41 0 top
FD37  FIDUCIALUFIDUCIAL  [FIDUCIAL-MICRO]  53.72,89.53 0 bottom
FD38  FIDUCIALUFIDUCIAL  [FIDUCIAL-MICRO]  53.72,89.53 0 top
FD39  FIDUCIALUFIDUCIAL  [FIDUCIAL-MICRO]  37.21,65.41 0 bottom
FD40  FIDUCIALUFIDUCIAL  [FIDUCIAL-MICRO]  37.21,65.41 0 top
FD41  FIDUCIALUFIDUCIAL  [FIDUCIAL-MICRO]  79.63,89.53 0 bottom
FD42  FIDUCIALUFIDUCIAL  [FIDUCIAL-MICRO]  79.63,89.53 0 top
FD43  FIDUCIALUFIDUCIAL  [FIDUCIAL-MICRO]  63.12,65.41 0 bottom
FD44  FIDUCIALUFIDUCIAL  [FIDUCIAL-MICRO]  63.12,65.41 0 top
FD45  FIDUCIALUFIDUCIAL  [FIDUCIAL-MICRO]  105.54,89.53 0 bottom
FD46  FIDUCIALUFIDUCIAL  [FIDUCIAL-MICRO]  105.54,89.53 0 top
FD47  FIDUCIALUFIDUCIAL  [FIDUCIAL-MICRO]  89.03,65.41 0 bottom
FD48  FIDUCIALUFIDUCIAL  [FIDUCIAL-MICRO]  89.03,65.41 0 top
FD49  FIDUCIALUFIDUCIAL  [FIDUCIAL-MICRO]  27.81,117.47 0 bottom
FD50  FIDUCIALUFIDUCIAL  [FIDUCIAL-MICRO]  27.81,117.47 0 top
FD51  FIDUCIALUFIDUCIAL  [FIDUCIAL-MICRO]  11.3,93.34 0 bottom
FD52  FIDUCIALUFIDUCIAL  [FIDUCIAL-MICRO]  11.3,93.34 0 top
FD53  FIDUCIALUFIDUCIAL  [FIDUCIAL-MICRO]  53.72,117.47 0 bottom
FD54  FIDUCIALUFIDUCIAL  [FIDUCIAL-MICRO]  53.72,117.47 0 top
FD55  FIDUCIALUFIDUCIAL  [FIDUCIAL-MICRO]  37.21,93.34 0 bottom
FD56  FIDUCIALUFIDUCIAL  [FIDUCIAL-MICRO]  37.21,93.34 0 top
FD57  FIDUCIALUFIDUCIAL  [FIDUCIAL-MICRO]  79.63,117.47 0 bottom
FD58  FIDUCIALUFIDUCIAL  [FIDUCIAL-MICRO]  79.63,117.47 0 top
FD59  FIDUCIALUFIDUCIAL  [FIDUCIAL-MICRO]  63.12,93.34 0 bottom
FD60  FIDUCIALUFIDUCIAL  [FIDUCIAL-MICRO]  63.12,93.34 0 top
FD61  FIDUCIALUFIDUCIAL  [FIDUCIAL-MICRO]  105.54,117.47 0 bottom
FD62  FIDUCIALUFIDUCIAL  [FIDUCIAL-MICRO]  105.54,117.47 0 top
FD63  FIDUCIALUFIDUCIAL  [FIDUCIAL-MICRO]  89.03,93.34 0 bottom
FD64  FIDUCIALUFIDUCIAL  [FIDUCIAL-MICRO]  89.03,93.34 0 top
FD65  FIDUCIALUFIDUCIAL  [FIDUCIAL-MICRO]  27.81,145.42 0 bottom
FD66  FIDUCIALUFIDUCIAL  [FIDUCIAL-MICRO]  27.81,145.42 0 top
FD67  FIDUCIALUFIDUCIAL  [FIDUCIAL-MICRO]  11.3,121.28 0 bottom
FD68  FIDUCIALUFIDUCIAL  [FIDUCIAL-MICRO]  11.3,121.28 0 top
FD69  FIDUCIALUFIDUCIAL  [FIDUCIAL-MICRO]  53.72,145.42 0 bottom
FD70  FIDUCIALUFIDUCIAL  [FIDUCIAL-MICRO]  53.72,145.42 0 top
FD71  FIDUCIALUFIDUCIAL  [FIDUCIAL-MICRO]  37.21,121.28 0 bottom
FD72  FIDUCIALUFIDUCIAL  [FIDUCIAL-MICRO]  37.21,121.28 0 top
FD73  FIDUCIALUFIDUCIAL  [FIDUCIAL-MICRO]  79.63,145.42 0 bottom
FD74  FIDUCIALUFIDUCIAL  [FIDUCIAL-MICRO]  79.63,145.42 0 top
FD75  FIDUCIALUFIDUCIAL  [FIDUCIAL-MICRO]  63.12,121.28 0 bottom
FD76  FIDUCIALUFIDUCIAL  [FIDUCIAL-MICRO]  63.12,121.28 0 top
FD77  FIDUCIALUFIDUCIAL  [FIDUCIAL-MICRO]  105.54,145.42 0 bottom
FD78  FIDUCIALUFIDUCIAL  [FIDUCIAL-MICRO]  105.54,145.42 0 top
FD79  FIDUCIALUFIDUCIAL  [FIDUCIAL-MICRO]  89.03,121.28 0 bottom
FD80  FIDUCIALUFIDUCIAL  [FIDUCIAL-MICRO]  89.03,121.28 0 top
FRAME1  FRAME-LETTER  [CREATIVE_COMMONS]  -3.3,-16.51 0 top  (outside the outline)
FRAME2  FRAME-LETTER  [CREATIVE_COMMONS]  22.61,-16.51 0 top  (outside the outline)
FRAME3  FRAME-LETTER  [CREATIVE_COMMONS]  48.51,-16.51 0 top  (outside the outline)
FRAME4  FRAME-LETTER  [CREATIVE_COMMONS]  74.42,-16.51 0 top  (outside the outline)
FRAME5  FRAME-LETTER  [CREATIVE_COMMONS]  -3.3,11.43 0 top  (outside the outline)
FRAME6  FRAME-LETTER  [CREATIVE_COMMONS]  22.61,11.43 0 top
FRAME7  FRAME-LETTER  [CREATIVE_COMMONS]  48.51,11.43 0 top
FRAME8  FRAME-LETTER  [CREATIVE_COMMONS]  74.42,11.43 0 top
FRAME9  FRAME-LETTER  [CREATIVE_COMMONS]  -3.3,39.37 0 top  (outside the outline)
FRAME10  FRAME-LETTER  [CREATIVE_COMMONS]  22.61,39.37 0 top
FRAME11  FRAME-LETTER  [CREATIVE_COMMONS]  48.51,39.37 0 top
FRAME12  FRAME-LETTER  [CREATIVE_COMMONS]  74.42,39.37 0 top
FRAME13  FRAME-LETTER  [CREATIVE_COMMONS]  -3.3,67.31 0 top  (outside the outline)
FRAME14  FRAME-LETTER  [CREATIVE_COMMONS]  22.61,67.31 0 top
FRAME15  FRAME-LETTER  [CREATIVE_COMMONS]  48.51,67.31 0 top
FRAME16  FRAME-LETTER  [CREATIVE_COMMONS]  74.42,67.31 0 top
FRAME17  FRAME-LETTER  [CREATIVE_COMMONS]  -3.3,95.25 0 top  (outside the outline)
FRAME18  FRAME-LETTER  [CREATIVE_COMMONS]  22.61,95.25 0 top
FRAME19  FRAME-LETTER  [CREATIVE_COMMONS]  48.51,95.25 0 top
FRAME20  FRAME-LETTER  [CREATIVE_COMMONS]  74.42,95.25 0 top
H1  STAND-OFF  [STAND-OFF]  29.72,11.43 0 top
H2  STAND-OFF  [STAND-OFF]  9.4,11.43 0 top
H3  STAND-OFF  [STAND-OFF]  9.4,31.75 0 top
H4  STAND-OFF  [STAND-OFF]  29.72,31.75 0 top
H5  STAND-OFF  [STAND-OFF]  55.63,11.43 0 top
H6  STAND-OFF  [STAND-OFF]  35.31,11.43 0 top
H7  STAND-OFF  [STAND-OFF]  35.31,31.75 0 top
H8  STAND-OFF  [STAND-OFF]  55.63,31.75 0 top
H9  STAND-OFF  [STAND-OFF]  81.53,11.43 0 top
H10  STAND-OFF  [STAND-OFF]  61.21,11.43 0 top
H11  STAND-OFF  [STAND-OFF]  61.21,31.75 0 top
H12  STAND-OFF  [STAND-OFF]  81.53,31.75 0 top
H13  STAND-OFF  [STAND-OFF]  107.44,11.43 0 top
H14  STAND-OFF  [STAND-OFF]  87.12,11.43 0 top
H15  STAND-OFF  [STAND-OFF]  87.12,31.75 0 top
H16  STAND-OFF  [STAND-OFF]  107.44,31.75 0 top
H17  STAND-OFF  [STAND-OFF]  29.72,39.37 0 top
H18  STAND-OFF  [STAND-OFF]  9.4,39.37 0 top
H19  STAND-OFF  [STAND-OFF]  9.4,59.69 0 top
H20  STAND-OFF  [STAND-OFF]  29.72,59.69 0 top
H21  STAND-OFF  [STAND-OFF]  55.63,39.37 0 top
H22  STAND-OFF  [STAND-OFF]  35.31,39.37 0 top
H23  STAND-OFF  [STAND-OFF]  35.31,59.69 0 top
H24  STAND-OFF  [STAND-OFF]  55.63,59.69 0 top
H25  STAND-OFF  [STAND-OFF]  81.53,39.37 0 top
H26  STAND-OFF  [STAND-OFF]  61.21,39.37 0 top
H27  STAND-OFF  [STAND-OFF]  61.21,59.69 0 top
H28  STAND-OFF  [STAND-OFF]  81.53,59.69 0 top
H29  STAND-OFF  [STAND-OFF]  107.44,39.37 0 top
H30  STAND-OFF  [STAND-OFF]  87.12,39.37 0 top
H31  STAND-OFF  [STAND-OFF]  87.12,59.69 0 top
H32  STAND-OFF  [STAND-OFF]  107.44,59.69 0 top
H33  STAND-OFF  [STAND-OFF]  29.72,67.31 0 top
H34  STAND-OFF  [STAND-OFF]  9.4,67.31 0 top
H35  STAND-OFF  [STAND-OFF]  9.4,87.63 0 top
H36  STAND-OFF  [STAND-OFF]  29.72,87.63 0 top
H37  STAND-OFF  [STAND-OFF]  55.63,67.31 0 top
H38  STAND-OFF  [STAND-OFF]  35.31,67.31 0 top
H39  STAND-OFF  [STAND-OFF]  35.31,87.63 0 top
H40  STAND-OFF  [STAND-OFF]  55.63,87.63 0 top
H41  STAND-OFF  [STAND-OFF]  81.53,67.31 0 top
H42  STAND-OFF  [STAND-OFF]  61.21,67.31 0 top
H43  STAND-OFF  [STAND-OFF]  61.21,87.63 0 top
H44  STAND-OFF  [STAND-OFF]  81.53,87.63 0 top
H45  STAND-OFF  [STAND-OFF]  107.44,67.31 0 top
H46  STAND-OFF  [STAND-OFF]  87.12,67.31 0 top
H47  STAND-OFF  [STAND-OFF]  87.12,87.63 0 top
H48  STAND-OFF  [STAND-OFF]  107.44,87.63 0 top
H49  STAND-OFF  [STAND-OFF]  29.72,95.25 0 top
H50  STAND-OFF  [STAND-OFF]  9.4,95.25 0 top
H51  STAND-OFF  [STAND-OFF]  9.4,115.57 0 top
H52  STAND-OFF  [STAND-OFF]  29.72,115.57 0 top
H53  STAND-OFF  [STAND-OFF]  55.63,95.25 0 top
H54  STAND-OFF  [STAND-OFF]  35.31,95.25 0 top
H55  STAND-OFF  [STAND-OFF]  35.31,115.57 0 top
H56  STAND-OFF  [STAND-OFF]  55.63,115.57 0 top
H57  STAND-OFF  [STAND-OFF]  81.53,95.25 0 top
H58  STAND-OFF  [STAND-OFF]  61.21,95.25 0 top
H59  STAND-OFF  [STAND-OFF]  61.21,115.57 0 top
H60  STAND-OFF  [STAND-OFF]  81.53,115.57 0 top
H61  STAND-OFF  [STAND-OFF]  107.44,95.25 0 top
H62  STAND-OFF  [STAND-OFF]  87.12,95.25 0 top
H63  STAND-OFF  [STAND-OFF]  87.12,115.57 0 top
H64  STAND-OFF  [STAND-OFF]  107.44,115.57 0 top
H65  STAND-OFF  [STAND-OFF]  29.72,123.19 0 top
H66  STAND-OFF  [STAND-OFF]  9.4,123.19 0 top
H67  STAND-OFF  [STAND-OFF]  9.4,143.51 0 top
H68  STAND-OFF  [STAND-OFF]  29.72,143.51 0 top
H69  STAND-OFF  [STAND-OFF]  55.63,123.19 0 top
H70  STAND-OFF  [STAND-OFF]  35.31,123.19 0 top
H71  STAND-OFF  [STAND-OFF]  35.31,143.51 0 top
H72  STAND-OFF  [STAND-OFF]  55.63,143.51 0 top
H73  STAND-OFF  [STAND-OFF]  81.53,123.19 0 top
H74  STAND-OFF  [STAND-OFF]  61.21,123.19 0 top
H75  STAND-OFF  [STAND-OFF]  61.21,143.51 0 top
H76  STAND-OFF  [STAND-OFF]  81.53,143.51 0 top
H77  STAND-OFF  [STAND-OFF]  107.44,123.19 0 top
H78  STAND-OFF  [STAND-OFF]  87.12,123.19 0 top
H79  STAND-OFF  [STAND-OFF]  87.12,143.51 0 top
H80  STAND-OFF  [STAND-OFF]  107.44,143.51 0 top
I2C  JUMPER-SMT_3_2-NC_TRACE_SILK  [SMT-JUMPER_3_2-NC_TRACE_SILK]  19.56,18.41 180 top
I2C1  JUMPER-SMT_3_2-NC_TRACE_SILK  [SMT-JUMPER_3_2-NC_TRACE_SILK]  45.47,18.41 180 top
I2C2  JUMPER-SMT_3_2-NC_TRACE_SILK  [SMT-JUMPER_3_2-NC_TRACE_SILK]  71.37,18.41 180 top
I2C3  JUMPER-SMT_3_2-NC_TRACE_SILK  [SMT-JUMPER_3_2-NC_TRACE_SILK]  97.28,18.41 180 top
I2C4  JUMPER-SMT_3_2-NC_TRACE_SILK  [SMT-JUMPER_3_2-NC_TRACE_SILK]  19.56,46.36 180 top
I2C5  JUMPER-SMT_3_2-NC_TRACE_SILK  [SMT-JUMPER_3_2-NC_TRACE_SILK]  45.47,46.36 180 top
I2C6  JUMPER-SMT_3_2-NC_TRACE_SILK  [SMT-JUMPER_3_2-NC_TRACE_SILK]  71.37,46.36 180 top
I2C7  JUMPER-SMT_3_2-NC_TRACE_SILK  [SMT-JUMPER_3_2-NC_TRACE_SILK]  97.28,46.36 180 top
I2C8  JUMPER-SMT_3_2-NC_TRACE_SILK  [SMT-JUMPER_3_2-NC_TRACE_SILK]  19.56,74.3 180 top
I2C9  JUMPER-SMT_3_2-NC_TRACE_SILK  [SMT-JUMPER_3_2-NC_TRACE_SILK]  45.47,74.3 180 top
I2C10  JUMPER-SMT_3_2-NC_TRACE_SILK  [SMT-JUMPER_3_2-NC_TRACE_SILK]  71.37,74.3 180 top
I2C11  JUMPER-SMT_3_2-NC_TRACE_SILK  [SMT-JUMPER_3_2-NC_TRACE_SILK]  97.28,74.3 180 top
I2C12  JUMPER-SMT_3_2-NC_TRACE_SILK  [SMT-JUMPER_3_2-NC_TRACE_SILK]  19.56,102.23 180 top
I2C13  JUMPER-SMT_3_2-NC_TRACE_SILK  [SMT-JUMPER_3_2-NC_TRACE_SILK]  45.47,102.23 180 top
I2C14  JUMPER-SMT_3_2-NC_TRACE_SILK  [SMT-JUMPER_3_2-NC_TRACE_SILK]  71.37,102.23 180 top
I2C15  JUMPER-SMT_3_2-NC_TRACE_SILK  [SMT-JUMPER_3_2-NC_TRACE_SILK]  97.28,102.23 180 top
I2C16  JUMPER-SMT_3_2-NC_TRACE_SILK  [SMT-JUMPER_3_2-NC_TRACE_SILK]  19.56,130.18 180 top
I2C17  JUMPER-SMT_3_2-NC_TRACE_SILK  [SMT-JUMPER_3_2-NC_TRACE_SILK]  45.47,130.18 180 top
I2C18  JUMPER-SMT_3_2-NC_TRACE_SILK  [SMT-JUMPER_3_2-NC_TRACE_SILK]  71.37,130.18 180 top
I2C19  JUMPER-SMT_3_2-NC_TRACE_SILK  [SMT-JUMPER_3_2-NC_TRACE_SILK]  97.28,130.18 180 top
J1  USB Female Type C Connector  [USB-C-16P_4LAYER-PADS]  19.56,16.64 0 bottom
J2  [1X06_NO_SILK]  30.99,27.94 270 top
J3  [1X06_NO_SILK]  8.13,27.94 270 top
J4  QWIIC_RIGHT_ANGLE  [JST04_1MM_RA]  19.56,13.97 0 top
J5  [JST-2-SMD]  19.56,30.48 0 top
J6  USB Female Type C Connector  [USB-C-16P_4LAYER-PADS]  45.47,16.64 0 bottom
J7  [1X06_NO_SILK]  56.9,27.94 270 top
J8  [1X06_NO_SILK]  34.04,27.94 270 top
J9  [JST-2-SMD]  45.47,30.48 0 top
J10  QWIIC_RIGHT_ANGLE  [JST04_1MM_RA]  45.47,13.97 0 top
J11  USB Female Type C Connector  [USB-C-16P_4LAYER-PADS]  71.37,16.64 0 bottom
J12  [1X06_NO_SILK]  82.8,27.94 270 top
J13  [1X06_NO_SILK]  59.94,27.94 270 top
J14  [JST-2-SMD]  71.37,30.48 0 top
J15  QWIIC_RIGHT_ANGLE  [JST04_1MM_RA]  71.37,13.97 0 top
J16  USB Female Type C Connector  [USB-C-16P_4LAYER-PADS]  97.28,16.64 0 bottom
J17  [1X06_NO_SILK]  108.71,27.94 270 top
J18  [1X06_NO_SILK]  85.85,27.94 270 top
J19  [JST-2-SMD]  97.28,30.48 0 top
J20  QWIIC_RIGHT_ANGLE  [JST04_1MM_RA]  97.28,13.97 0 top
J21  USB Female Type C Connector  [USB-C-16P_4LAYER-PADS]  19.56,44.58 0 bottom
J22  [1X06_NO_SILK]  30.99,55.88 270 top
J23  [1X06_NO_SILK]  8.13,55.88 270 top
J24  [JST-2-SMD]  19.56,58.42 0 top
J25  QWIIC_RIGHT_ANGLE  [JST04_1MM_RA]  19.56,41.91 0 top
J26  USB Female Type C Connector  [USB-C-16P_4LAYER-PADS]  45.47,44.58 0 bottom
J27  [1X06_NO_SILK]  56.9,55.88 270 top
J28  [1X06_NO_SILK]  34.04,55.88 270 top
J29  [JST-2-SMD]  45.47,58.42 0 top
J30  QWIIC_RIGHT_ANGLE  [JST04_1MM_RA]  45.47,41.91 0 top
J31  USB Female Type C Connector  [USB-C-16P_4LAYER-PADS]  71.37,44.58 0 bottom
J32  [1X06_NO_SILK]  82.8,55.88 270 top
J33  [1X06_NO_SILK]  59.94,55.88 270 top
J34  [JST-2-SMD]  71.37,58.42 0 top
J35  QWIIC_RIGHT_ANGLE  [JST04_1MM_RA]  71.37,41.91 0 top
J36  USB Female Type C Connector  [USB-C-16P_4LAYER-PADS]  97.28,44.58 0 bottom
J37  [1X06_NO_SILK]  108.71,55.88 270 top
J38  [1X06_NO_SILK]  85.85,55.88 270 top
J39  [JST-2-SMD]  97.28,58.42 0 top
J40  QWIIC_RIGHT_ANGLE  [JST04_1MM_RA]  97.28,41.91 0 top
J41  USB Female Type C Connector  [USB-C-16P_4LAYER-PADS]  19.56,72.52 0 bottom
J42  [1X06_NO_SILK]  30.99,83.82 270 top
J43  [1X06_NO_SILK]  8.13,83.82 270 top
J44  [JST-2-SMD]  19.56,86.36 0 top
J45  QWIIC_RIGHT_ANGLE  [JST04_1MM_RA]  19.56,69.85 0 top
J46  USB Female Type C Connector  [USB-C-16P_4LAYER-PADS]  45.47,72.52 0 bottom
J47  [1X06_NO_SILK]  56.9,83.82 270 top
J48  [1X06_NO_SILK]  34.04,83.82 270 top
J49  [JST-2-SMD]  45.47,86.36 0 top
J50  QWIIC_RIGHT_ANGLE  [JST04_1MM_RA]  45.47,69.85 0 top
J51  USB Female Type C Connector  [USB-C-16P_4LAYER-PADS]  71.37,72.52 0 bottom
J52  [1X06_NO_SILK]  82.8,83.82 270 top
J53  [1X06_NO_SILK]  59.94,83.82 270 top
J54  [JST-2-SMD]  71.37,86.36 0 top
J55  QWIIC_RIGHT_ANGLE  [JST04_1MM_RA]  71.37,69.85 0 top
J56  USB Female Type C Connector  [USB-C-16P_4LAYER-PADS]  97.28,72.52 0 bottom
J57  [1X06_NO_SILK]  108.71,83.82 270 top
J58  [1X06_NO_SILK]  85.85,83.82 270 top
J59  [JST-2-SMD]  97.28,86.36 0 top
J60  QWIIC_RIGHT_ANGLE  [JST04_1MM_RA]  97.28,69.85 0 top
J61  USB Female Type C Connector  [USB-C-16P_4LAYER-PADS]  19.56,100.46 0 bottom
J62  [1X06_NO_SILK]  30.99,111.76 270 top
J63  [1X06_NO_SILK]  8.13,111.76 270 top
J64  [JST-2-SMD]  19.56,114.3 0 top
J65  QWIIC_RIGHT_ANGLE  [JST04_1MM_RA]  19.56,97.79 0 top
J66  USB Female Type C Connector  [USB-C-16P_4LAYER-PADS]  45.47,100.46 0 bottom
J67  [1X06_NO_SILK]  56.9,111.76 270 top
J68  [1X06_NO_SILK]  34.04,111.76 270 top
J69  [JST-2-SMD]  45.47,114.3 0 top
J70  QWIIC_RIGHT_ANGLE  [JST04_1MM_RA]  45.47,97.79 0 top
J71  USB Female Type C Connector  [USB-C-16P_4LAYER-PADS]  71.37,100.46 0 bottom
J72  [1X06_NO_SILK]  82.8,111.76 270 top
J73  [1X06_NO_SILK]  59.94,111.76 270 top
J74  [JST-2-SMD]  71.37,114.3 0 top
J75  QWIIC_RIGHT_ANGLE  [JST04_1MM_RA]  71.37,97.79 0 top
J76  USB Female Type C Connector  [USB-C-16P_4LAYER-PADS]  97.28,100.46 0 bottom
J77  [1X06_NO_SILK]  108.71,111.76 270 top
J78  [1X06_NO_SILK]  85.85,111.76 270 top
J79  [JST-2-SMD]  97.28,114.3 0 top
J80  QWIIC_RIGHT_ANGLE  [JST04_1MM_RA]  97.28,97.79 0 top
J81  USB Female Type C Connector  [USB-C-16P_4LAYER-PADS]  19.56,128.4 0 bottom
J82  [1X06_NO_SILK]  30.99,139.7 270 top
J83  [1X06_NO_SILK]  8.13,139.7 270 top
J84  [JST-2-SMD]  19.56,142.24 0 top
J85  QWIIC_RIGHT_ANGLE  [JST04_1MM_RA]  19.56,125.73 0 top
J86  USB Female Type C Connector  [USB-C-16P_4LAYER-PADS]  45.47,128.4 0 bottom
J87  [1X06_NO_SILK]  56.9,139.7 270 top
J88  [1X06_NO_SILK]  34.04,139.7 270 top
J89  [JST-2-SMD]  45.47,142.24 0 top
J90  QWIIC_RIGHT_ANGLE  [JST04_1MM_RA]  45.47,125.73 0 top
J91  USB Female Type C Connector  [USB-C-16P_4LAYER-PADS]  71.37,128.4 0 bottom
J92  [1X06_NO_SILK]  82.8,139.7 270 top
J93  [1X06_NO_SILK]  59.94,139.7 270 top
J94  [JST-2-SMD]  71.37,142.24 0 top
J95  QWIIC_RIGHT_ANGLE  [JST04_1MM_RA]  71.37,125.73 0 top
J96  USB Female Type C Connector  [USB-C-16P_4LAYER-PADS]  97.28,128.4 0 bottom
J97  [1X06_NO_SILK]  108.71,139.7 270 top
J98  [1X06_NO_SILK]  85.85,139.7 270 top
J99  [JST-2-SMD]  97.28,142.24 0 top
J100  QWIIC_RIGHT_ANGLE  [JST04_1MM_RA]  97.28,125.73 0 top
LOGO1  SFE_LOGO_NAME_FLAMEBLANK  [BLANK]  -2.03,-16.51 0 top  (outside the outline)
LOGO2  OSHW-LOGOS  [OSHW-LOGO-S]  13.21,31.75 0 top
LOGO3  QWIIC_LOGO_3MM  [QWIIC_3MM]  19.56,15.18 0 top
LOGO4  SFE_LOGO_NAME_FLAMEBLANK  [BLANK]  23.88,-16.51 0 top  (outside the outline)
LOGO5  OSHW-LOGOS  [OSHW-LOGO-S]  39.12,31.75 0 top
LOGO6  QWIIC_LOGO_3MM  [QWIIC_3MM]  45.47,15.18 0 top
LOGO7  SFE_LOGO_NAME_FLAMEBLANK  [BLANK]  49.78,-16.51 0 top  (outside the outline)
LOGO8  OSHW-LOGOS  [OSHW-LOGO-S]  65.02,31.75 0 top
LOGO9  QWIIC_LOGO_3MM  [QWIIC_3MM]  71.37,15.18 0 top
LOGO10  SFE_LOGO_NAME_FLAMEBLANK  [BLANK]  75.69,-16.51 0 top  (outside the outline)
LOGO11  OSHW-LOGOS  [OSHW-LOGO-S]  90.93,31.75 0 top
LOGO12  QWIIC_LOGO_3MM  [QWIIC_3MM]  97.28,15.18 0 top
LOGO13  SFE_LOGO_NAME_FLAMEBLANK  [BLANK]  -2.03,11.43 0 top
LOGO14  OSHW-LOGOS  [OSHW-LOGO-S]  13.21,59.69 0 top
LOGO15  QWIIC_LOGO_3MM  [QWIIC_3MM]  19.56,43.12 0 top
LOGO16  SFE_LOGO_NAME_FLAMEBLANK  [BLANK]  23.88,11.43 0 top
LOGO17  OSHW-LOGOS  [OSHW-LOGO-S]  39.12,59.69 0 top
LOGO18  QWIIC_LOGO_3MM  [QWIIC_3MM]  45.47,43.12 0 top
LOGO19  SFE_LOGO_NAME_FLAMEBLANK  [BLANK]  49.78,11.43 0 top
LOGO20  OSHW-LOGOS  [OSHW-LOGO-S]  65.02,59.69 0 top
LOGO21  QWIIC_LOGO_3MM  [QWIIC_3MM]  71.37,43.12 0 top
LOGO22  SFE_LOGO_NAME_FLAMEBLANK  [BLANK]  75.69,11.43 0 top
LOGO23  OSHW-LOGOS  [OSHW-LOGO-S]  90.93,59.69 0 top
LOGO24  QWIIC_LOGO_3MM  [QWIIC_3MM]  97.28,43.12 0 top
LOGO25  SFE_LOGO_NAME_FLAMEBLANK  [BLANK]  -2.03,39.37 0 top
LOGO26  OSHW-LOGOS  [OSHW-LOGO-S]  13.21,87.63 0 top
LOGO27  QWIIC_LOGO_3MM  [QWIIC_3MM]  19.56,71.06 0 top
LOGO28  SFE_LOGO_NAME_FLAMEBLANK  [BLANK]  23.88,39.37 0 top
LOGO29  OSHW-LOGOS  [OSHW-LOGO-S]  39.12,87.63 0 top
LOGO30  QWIIC_LOGO_3MM  [QWIIC_3MM]  45.47,71.06 0 top
LOGO31  SFE_LOGO_NAME_FLAMEBLANK  [BLANK]  49.78,39.37 0 top
LOGO32  OSHW-LOGOS  [OSHW-LOGO-S]  65.02,87.63 0 top
LOGO33  QWIIC_LOGO_3MM  [QWIIC_3MM]  71.37,71.06 0 top
LOGO34  SFE_LOGO_NAME_FLAMEBLANK  [BLANK]  75.69,39.37 0 top
LOGO35  OSHW-LOGOS  [OSHW-LOGO-S]  90.93,87.63 0 top
LOGO36  QWIIC_LOGO_3MM  [QWIIC_3MM]  97.28,71.06 0 top
LOGO37  SFE_LOGO_NAME_FLAMEBLANK  [BLANK]  -2.03,67.31 0 top
LOGO38  OSHW-LOGOS  [OSHW-LOGO-S]  13.21,115.57 0 top
LOGO39  QWIIC_LOGO_3MM  [QWIIC_3MM]  19.56,99 0 top
LOGO40  SFE_LOGO_NAME_FLAMEBLANK  [BLANK]  23.88,67.31 0 top
LOGO41  OSHW-LOGOS  [OSHW-LOGO-S]  39.12,115.57 0 top
LOGO42  QWIIC_LOGO_3MM  [QWIIC_3MM]  45.47,99 0 top
LOGO43  SFE_LOGO_NAME_FLAMEBLANK  [BLANK]  49.78,67.31 0 top
LOGO44  OSHW-LOGOS  [OSHW-LOGO-S]  65.02,115.57 0 top
LOGO45  QWIIC_LOGO_3MM  [QWIIC_3MM]  71.37,99 0 top
LOGO46  SFE_LOGO_NAME_FLAMEBLANK  [BLANK]  75.69,67.31 0 top
LOGO47  OSHW-LOGOS  [OSHW-LOGO-S]  90.93,115.57 0 top
LOGO48  QWIIC_LOGO_3MM  [QWIIC_3MM]  97.28,99 0 top
LOGO49  SFE_LOGO_NAME_FLAMEBLANK  [BLANK]  -2.03,95.25 0 top
LOGO50  OSHW-LOGOS  [OSHW-LOGO-S]  13.21,143.51 0 top
LOGO51  QWIIC_LOGO_3MM  [QWIIC_3MM]  19.56,126.94 0 top
LOGO52  SFE_LOGO_NAME_FLAMEBLANK  [BLANK]  23.88,95.25 0 top
LOGO53  OSHW-LOGOS  [OSHW-LOGO-S]  39.12,143.51 0 top
LOGO54  QWIIC_LOGO_3MM  [QWIIC_3MM]  45.47,126.94 0 top
LOGO55  SFE_LOGO_NAME_FLAMEBLANK  [BLANK]  49.78,95.25 0 top
LOGO56  OSHW-LOGOS  [OSHW-LOGO-S]  65.02,143.51 0 top
LOGO57  QWIIC_LOGO_3MM  [QWIIC_3MM]  71.37,126.94 0 top
LOGO58  SFE_LOGO_NAME_FLAMEBLANK  [BLANK]  75.69,95.25 0 top
LOGO59  OSHW-LOGOS  [OSHW-LOGO-S]  90.93,143.51 0 top
LOGO60  QWIIC_LOGO_3MM  [QWIIC_3MM]  97.28,126.94 0 top
PWR  JUMPER-SMT_2_NC_TRACE_SILK  [SMT-JUMPER_2_NC_TRACE_SILK]  24.38,13.46 180 top
PWR1  JUMPER-SMT_2_NC_TRACE_SILK  [SMT-JUMPER_2_NC_TRACE_SILK]  50.29,13.46 180 top
PWR2  JUMPER-SMT_2_NC_TRACE_SILK  [SMT-JUMPER_2_NC_TRACE_SILK]  76.2,13.46 180 top
PWR3  JUMPER-SMT_2_NC_TRACE_SILK  [SMT-JUMPER_2_NC_TRACE_SILK]  102.11,13.46 180 top
PWR4  JUMPER-SMT_2_NC_TRACE_SILK  [SMT-JUMPER_2_NC_TRACE_SILK]  24.38,41.4 180 top
PWR5  JUMPER-SMT_2_NC_TRACE_SILK  [SMT-JUMPER_2_NC_TRACE_SILK]  50.29,41.4 180 top
PWR6  JUMPER-SMT_2_NC_TRACE_SILK  [SMT-JUMPER_2_NC_TRACE_SILK]  76.2,41.4 180 top
PWR7  JUMPER-SMT_2_NC_TRACE_SILK  [SMT-JUMPER_2_NC_TRACE_SILK]  102.11,41.4 180 top
PWR8  JUMPER-SMT_2_NC_TRACE_SILK  [SMT-JUMPER_2_NC_TRACE_SILK]  24.38,69.34 180 top
PWR9  JUMPER-SMT_2_NC_TRACE_SILK  [SMT-JUMPER_2_NC_TRACE_SILK]  50.29,69.34 180 top
PWR10  JUMPER-SMT_2_NC_TRACE_SILK  [SMT-JUMPER_2_NC_TRACE_SILK]  76.2,69.34 180 top
PWR11  JUMPER-SMT_2_NC_TRACE_SILK  [SMT-JUMPER_2_NC_TRACE_SILK]  102.11,69.34 180 top
PWR12  JUMPER-SMT_2_NC_TRACE_SILK  [SMT-JUMPER_2_NC_TRACE_SILK]  24.38,97.28 180 top
PWR13  JUMPER-SMT_2_NC_TRACE_SILK  [SMT-JUMPER_2_NC_TRACE_SILK]  50.29,97.28 180 top
PWR14  JUMPER-SMT_2_NC_TRACE_SILK  [SMT-JUMPER_2_NC_TRACE_SILK]  76.2,97.28 180 top
PWR15  JUMPER-SMT_2_NC_TRACE_SILK  [SMT-JUMPER_2_NC_TRACE_SILK]  102.11,97.28 180 top
PWR16  JUMPER-SMT_2_NC_TRACE_SILK  [SMT-JUMPER_2_NC_TRACE_SILK]  24.38,125.22 180 top
PWR17  JUMPER-SMT_2_NC_TRACE_SILK  [SMT-JUMPER_2_NC_TRACE_SILK]  50.29,125.22 180 top
PWR18  JUMPER-SMT_2_NC_TRACE_SILK  [SMT-JUMPER_2_NC_TRACE_SILK]  76.2,125.22 180 top
PWR19  JUMPER-SMT_2_NC_TRACE_SILK  [SMT-JUMPER_2_NC_TRACE_SILK]  102.11,125.22 180 top
Q1  20V/4.2A/52mΩ/1.4W  [SOT23-3]  25.91,26.67 0 top
Q2  20V/4.2A/52mΩ/1.4W  [SOT23-3]  51.82,26.67 0 top
Q3  20V/4.2A/52mΩ/1.4W  [SOT23-3]  77.72,26.67 0 top
Q4  20V/4.2A/52mΩ/1.4W  [SOT23-3]  103.63,26.67 0 top
Q5  20V/4.2A/52mΩ/1.4W  [SOT23-3]  25.91,54.61 0 top
Q6  20V/4.2A/52mΩ/1.4W  [SOT23-3]  51.82,54.61 0 top
Q7  20V/4.2A/52mΩ/1.4W  [SOT23-3]  77.72,54.61 0 top
Q8  20V/4.2A/52mΩ/1.4W  [SOT23-3]  103.63,54.61 0 top
Q9  20V/4.2A/52mΩ/1.4W  [SOT23-3]  25.91,82.55 0 top
Q10  20V/4.2A/52mΩ/1.4W  [SOT23-3]  51.82,82.55 0 top
Q11  20V/4.2A/52mΩ/1.4W  [SOT23-3]  77.72,82.55 0 top
Q12  20V/4.2A/52mΩ/1.4W  [SOT23-3]  103.63,82.55 0 top
Q13  20V/4.2A/52mΩ/1.4W  [SOT23-3]  25.91,110.49 0 top
Q14  20V/4.2A/52mΩ/1.4W  [SOT23-3]  51.82,110.49 0 top
Q15  20V/4.2A/52mΩ/1.4W  [SOT23-3]  77.72,110.49 0 top
Q16  20V/4.2A/52mΩ/1.4W  [SOT23-3]  103.63,110.49 0 top
Q17  20V/4.2A/52mΩ/1.4W  [SOT23-3]  25.91,138.43 0 top
Q18  20V/4.2A/52mΩ/1.4W  [SOT23-3]  51.82,138.43 0 top
Q19  20V/4.2A/52mΩ/1.4W  [SOT23-3]  77.72,138.43 0 top
Q20  20V/4.2A/52mΩ/1.4W  [SOT23-3]  103.63,138.43 0 top
R1  4.7k  [0402-TIGHT]  24.13,10.03 0 top
R2  2.2k  [0402-TIGHT]  14.99,10.03 180 top
R3  2.2k  [0402-TIGHT]  19.05,16.51 90 top
R4  2.2k  [0402-TIGHT]  20.07,16.51 270 top
R5  5.1k  [0402-TIGHT]  18.03,16.51 270 top
R6  5.1k  [0402-TIGHT]  21.08,16.51 270 top
R7  100k  [0402-TIGHT]  25.15,22.86 270 top
R8  100k  [0402-TIGHT]  23.11,22.86 270 top
R9  4.7k  [0402-TIGHT]  14.99,22.86 270 top
R10  4.7k  [0402-TIGHT]  13.97,22.86 270 top
R11  100k  [0402-TIGHT]  24.13,22.86 90 top
R12  100k  [0402-TIGHT]  18.03,22.86 270 top
R13  1M  [0402-TIGHT]  20.07,22.86 90 top
R14  1M  [0402-TIGHT]  19.05,22.86 270 top
R15  4.7k  [0402-TIGHT]  50.04,10.03 0 top
R16  2.2k  [0402-TIGHT]  40.89,10.03 180 top
R17  2.2k  [0402-TIGHT]  44.96,16.51 90 top
R18  2.2k  [0402-TIGHT]  45.97,16.51 270 top
R19  5.1k  [0402-TIGHT]  43.94,16.51 270 top
R20  5.1k  [0402-TIGHT]  46.99,16.51 270 top
R21  100k  [0402-TIGHT]  51.05,22.86 270 top
R22  100k  [0402-TIGHT]  49.02,22.86 270 top
R23  4.7k  [0402-TIGHT]  40.89,22.86 270 top
R24  4.7k  [0402-TIGHT]  39.88,22.86 270 top
R25  100k  [0402-TIGHT]  50.04,22.86 90 top
R26  100k  [0402-TIGHT]  43.94,22.86 270 top
R27  1M  [0402-TIGHT]  45.97,22.86 90 top
R28  1M  [0402-TIGHT]  44.96,22.86 270 top
R29  4.7k  [0402-TIGHT]  75.95,10.03 0 top
R30  2.2k  [0402-TIGHT]  66.8,10.03 180 top
R31  2.2k  [0402-TIGHT]  70.87,16.51 90 top
R32  2.2k  [0402-TIGHT]  71.88,16.51 270 top
R33  5.1k  [0402-TIGHT]  69.85,16.51 270 top
R34  5.1k  [0402-TIGHT]  72.9,16.51 270 top
R35  100k  [0402-TIGHT]  76.96,22.86 270 top
R36  100k  [0402-TIGHT]  74.93,22.86 270 top
R37  4.7k  [0402-TIGHT]  66.8,22.86 270 top
R38  4.7k  [0402-TIGHT]  65.79,22.86 270 top
R39  100k  [0402-TIGHT]  75.95,22.86 90 top
R40  100k  [0402-TIGHT]  69.85,22.86 270 top
R41  1M  [0402-TIGHT]  71.88,22.86 90 top
R42  1M  [0402-TIGHT]  70.87,22.86 270 top
R43  4.7k  [0402-TIGHT]  101.85,10.03 0 top
R44  2.2k  [0402-TIGHT]  92.71,10.03 180 top
R45  2.2k  [0402-TIGHT]  96.77,16.51 90 top
R46  2.2k  [0402-TIGHT]  97.79,16.51 270 top
R47  5.1k  [0402-TIGHT]  95.76,16.51 270 top
R48  5.1k  [0402-TIGHT]  98.81,16.51 270 top
R49  100k  [0402-TIGHT]  102.87,22.86 270 top
R50  100k  [0402-TIGHT]  100.84,22.86 270 top
R51  4.7k  [0402-TIGHT]  92.71,22.86 270 top
R52  4.7k  [0402-TIGHT]  91.69,22.86 270 top
R53  100k  [0402-TIGHT]  101.85,22.86 90 top
R54  100k  [0402-TIGHT]  95.76,22.86 270 top
R55  1M  [0402-TIGHT]  97.79,22.86 90 top
R56  1M  [0402-TIGHT]  96.77,22.86 270 top
R57  4.7k  [0402-TIGHT]  24.13,37.97 0 top
R58  2.2k  [0402-TIGHT]  14.99,37.97 180 top
R59  2.2k  [0402-TIGHT]  19.05,44.45 90 top
R60  2.2k  [0402-TIGHT]  20.07,44.45 270 top
R61  5.1k  [0402-TIGHT]  18.03,44.45 270 top
R62  5.1k  [0402-TIGHT]  21.08,44.45 270 top
R63  100k  [0402-TIGHT]  25.15,50.8 270 top
R64  100k  [0402-TIGHT]  23.11,50.8 270 top
R65  4.7k  [0402-TIGHT]  14.99,50.8 270 top
R66  4.7k  [0402-TIGHT]  13.97,50.8 270 top
R67  100k  [0402-TIGHT]  24.13,50.8 90 top
R68  100k  [0402-TIGHT]  18.03,50.8 270 top
R69  1M  [0402-TIGHT]  20.07,50.8 90 top
R70  1M  [0402-TIGHT]  19.05,50.8 270 top
R71  4.7k  [0402-TIGHT]  50.04,37.97 0 top
R72  2.2k  [0402-TIGHT]  40.89,37.97 180 top
R73  2.2k  [0402-TIGHT]  44.96,44.45 90 top
R74  2.2k  [0402-TIGHT]  45.97,44.45 270 top
R75  5.1k  [0402-TIGHT]  43.94,44.45 270 top
R76  5.1k  [0402-TIGHT]  46.99,44.45 270 top
R77  100k  [0402-TIGHT]  51.05,50.8 270 top
R78  100k  [0402-TIGHT]  49.02,50.8 270 top
R79  4.7k  [0402-TIGHT]  40.89,50.8 270 top
R80  4.7k  [0402-TIGHT]  39.88,50.8 270 top
R81  100k  [0402-TIGHT]  50.04,50.8 90 top
R82  100k  [0402-TIGHT]  43.94,50.8 270 top
R83  1M  [0402-TIGHT]  45.97,50.8 90 top
R84  1M  [0402-TIGHT]  44.96,50.8 270 top
R85  4.7k  [0402-TIGHT]  75.95,37.97 0 top
R86  2.2k  [0402-TIGHT]  66.8,37.97 180 top
R87  2.2k  [0402-TIGHT]  70.87,44.45 90 top
R88  2.2k  [0402-TIGHT]  71.88,44.45 270 top
R89  5.1k  [0402-TIGHT]  69.85,44.45 270 top
R90  5.1k  [0402-TIGHT]  72.9,44.45 270 top
R91  100k  [0402-TIGHT]  76.96,50.8 270 top
R92  100k  [0402-TIGHT]  74.93,50.8 270 top
R93  4.7k  [0402-TIGHT]  66.8,50.8 270 top
R94  4.7k  [0402-TIGHT]  65.79,50.8 270 top
R95  100k  [0402-TIGHT]  75.95,50.8 90 top
R96  100k  [0402-TIGHT]  69.85,50.8 270 top
R97  1M  [0402-TIGHT]  71.88,50.8 90 top
R98  1M  [0402-TIGHT]  70.87,50.8 270 top
R99  4.7k  [0402-TIGHT]  101.85,37.97 0 top
R100  2.2k  [0402-TIGHT]  92.71,37.97 180 top
R101  2.2k  [0402-TIGHT]  96.77,44.45 90 top
R102  2.2k  [0402-TIGHT]  97.79,44.45 270 top
R103  5.1k  [0402-TIGHT]  95.76,44.45 270 top
R104  5.1k  [0402-TIGHT]  98.81,44.45 270 top
R105  100k  [0402-TIGHT]  102.87,50.8 270 top
R106  100k  [0402-TIGHT]  100.84,50.8 270 top
R107  4.7k  [0402-TIGHT]  92.71,50.8 270 top
R108  4.7k  [0402-TIGHT]  91.69,50.8 270 top
R109  100k  [0402-TIGHT]  101.85,50.8 90 top
R110  100k  [0402-TIGHT]  95.76,50.8 270 top
R111  1M  [0402-TIGHT]  97.79,50.8 90 top
R112  1M  [0402-TIGHT]  96.77,50.8 270 top
R113  4.7k  [0402-TIGHT]  24.13,65.91 0 top
R114  2.2k  [0402-TIGHT]  14.99,65.91 180 top
R115  2.2k  [0402-TIGHT]  19.05,72.39 90 top
R116  2.2k  [0402-TIGHT]  20.07,72.39 270 top
R117  5.1k  [0402-TIGHT]  18.03,72.39 270 top
R118  5.1k  [0402-TIGHT]  21.08,72.39 270 top
R119  100k  [0402-TIGHT]  25.15,78.74 270 top
R120  100k  [0402-TIGHT]  23.11,78.74 270 top
R121  4.7k  [0402-TIGHT]  14.99,78.74 270 top
R122  4.7k  [0402-TIGHT]  13.97,78.74 270 top
R123  100k  [0402-TIGHT]  24.13,78.74 90 top
R124  100k  [0402-TIGHT]  18.03,78.74 270 top
R125  1M  [0402-TIGHT]  20.07,78.74 90 top
R126  1M  [0402-TIGHT]  19.05,78.74 270 top
R127  4.7k  [0402-TIGHT]  50.04,65.91 0 top
R128  2.2k  [0402-TIGHT]  40.89,65.91 180 top
R129  2.2k  [0402-TIGHT]  44.96,72.39 90 top
R130  2.2k  [0402-TIGHT]  45.97,72.39 270 top
R131  5.1k  [0402-TIGHT]  43.94,72.39 270 top
R132  5.1k  [0402-TIGHT]  46.99,72.39 270 top
R133  100k  [0402-TIGHT]  51.05,78.74 270 top
R134  100k  [0402-TIGHT]  49.02,78.74 270 top
R135  4.7k  [0402-TIGHT]  40.89,78.74 270 top
R136  4.7k  [0402-TIGHT]  39.88,78.74 270 top
R137  100k  [0402-TIGHT]  50.04,78.74 90 top
R138  100k  [0402-TIGHT]  43.94,78.74 270 top
R139  1M  [0402-TIGHT]  45.97,78.74 90 top
R140  1M  [0402-TIGHT]  44.96,78.74 270 top
R141  4.7k  [0402-TIGHT]  75.95,65.91 0 top
R142  2.2k  [0402-TIGHT]  66.8,65.91 180 top
R143  2.2k  [0402-TIGHT]  70.87,72.39 90 top
R144  2.2k  [0402-TIGHT]  71.88,72.39 270 top
R145  5.1k  [0402-TIGHT]  69.85,72.39 270 top
R146  5.1k  [0402-TIGHT]  72.9,72.39 270 top
R147  100k  [0402-TIGHT]  76.96,78.74 270 top
R148  100k  [0402-TIGHT]  74.93,78.74 270 top
R149  4.7k  [0402-TIGHT]  66.8,78.74 270 top
R150  4.7k  [0402-TIGHT]  65.79,78.74 270 top
R151  100k  [0402-TIGHT]  75.95,78.74 90 top
R152  100k  [0402-TIGHT]  69.85,78.74 270 top
R153  1M  [0402-TIGHT]  71.88,78.74 90 top
R154  1M  [0402-TIGHT]  70.87,78.74 270 top
R155  4.7k  [0402-TIGHT]  101.85,65.91 0 top
R156  2.2k  [0402-TIGHT]  92.71,65.91 180 top
R157  2.2k  [0402-TIGHT]  96.77,72.39 90 top
R158  2.2k  [0402-TIGHT]  97.79,72.39 270 top
R159  5.1k  [0402-TIGHT]  95.76,72.39 270 top
R160  5.1k  [0402-TIGHT]  98.81,72.39 270 top
R161  100k  [0402-TIGHT]  102.87,78.74 270 top
R162  100k  [0402-TIGHT]  100.84,78.74 270 top
R163  4.7k  [0402-TIGHT]  92.71,78.74 270 top
R164  4.7k  [0402-TIGHT]  91.69,78.74 270 top
R165  100k  [0402-TIGHT]  101.85,78.74 90 top
R166  100k  [0402-TIGHT]  95.76,78.74 270 top
R167  1M  [0402-TIGHT]  97.79,78.74 90 top
R168  1M  [0402-TIGHT]  96.77,78.74 270 top
R169  4.7k  [0402-TIGHT]  24.13,93.85 0 top
R170  2.2k  [0402-TIGHT]  14.99,93.85 180 top
R171  2.2k  [0402-TIGHT]  19.05,100.33 90 top
R172  2.2k  [0402-TIGHT]  20.07,100.33 270 top
R173  5.1k  [0402-TIGHT]  18.03,100.33 270 top
R174  5.1k  [0402-TIGHT]  21.08,100.33 270 top
R175  100k  [0402-TIGHT]  25.15,106.68 270 top
R176  100k  [0402-TIGHT]  23.11,106.68 270 top
R177  4.7k  [0402-TIGHT]  14.99,106.68 270 top
R178  4.7k  [0402-TIGHT]  13.97,106.68 270 top
R179  100k  [0402-TIGHT]  24.13,106.68 90 top
R180  100k  [0402-TIGHT]  18.03,106.68 270 top
R181  1M  [0402-TIGHT]  20.07,106.68 90 top
R182  1M  [0402-TIGHT]  19.05,106.68 270 top
R183  4.7k  [0402-TIGHT]  50.04,93.85 0 top
R184  2.2k  [0402-TIGHT]  40.89,93.85 180 top
R185  2.2k  [0402-TIGHT]  44.96,100.33 90 top
R186  2.2k  [0402-TIGHT]  45.97,100.33 270 top
R187  5.1k  [0402-TIGHT]  43.94,100.33 270 top
R188  5.1k  [0402-TIGHT]  46.99,100.33 270 top
R189  100k  [0402-TIGHT]  51.05,106.68 270 top
R190  100k  [0402-TIGHT]  49.02,106.68 270 top
R191  4.7k  [0402-TIGHT]  40.89,106.68 270 top
R192  4.7k  [0402-TIGHT]  39.88,106.68 270 top
R193  100k  [0402-TIGHT]  50.04,106.68 90 top
R194  100k  [0402-TIGHT]  43.94,106.68 270 top
R195  1M  [0402-TIGHT]  45.97,106.68 90 top
R196  1M  [0402-TIGHT]  44.96,106.68 270 top
R197  4.7k  [0402-TIGHT]  75.95,93.85 0 top
R198  2.2k  [0402-TIGHT]  66.8,93.85 180 top
R199  2.2k  [0402-TIGHT]  70.87,100.33 90 top
R200  2.2k  [0402-TIGHT]  71.88,100.33 270 top
R201  5.1k  [0402-TIGHT]  69.85,100.33 270 top
R202  5.1k  [0402-TIGHT]  72.9,100.33 270 top
R203  100k  [0402-TIGHT]  76.96,106.68 270 top
R204  100k  [0402-TIGHT]  74.93,106.68 270 top
R205  4.7k  [0402-TIGHT]  66.8,106.68 270 top
R206  4.7k  [0402-TIGHT]  65.79,106.68 270 top
R207  100k  [0402-TIGHT]  75.95,106.68 90 top
R208  100k  [0402-TIGHT]  69.85,106.68 270 top
R209  1M  [0402-TIGHT]  71.88,106.68 90 top
R210  1M  [0402-TIGHT]  70.87,106.68 270 top
R211  4.7k  [0402-TIGHT]  101.85,93.85 0 top
R212  2.2k  [0402-TIGHT]  92.71,93.85 180 top
R213  2.2k  [0402-TIGHT]  96.77,100.33 90 top
R214  2.2k  [0402-TIGHT]  97.79,100.33 270 top
R215  5.1k  [0402-TIGHT]  95.76,100.33 270 top
R216  5.1k  [0402-TIGHT]  98.81,100.33 270 top
R217  100k  [0402-TIGHT]  102.87,106.68 270 top
R218  100k  [0402-TIGHT]  100.84,106.68 270 top
R219  4.7k  [0402-TIGHT]  92.71,106.68 270 top
R220  4.7k  [0402-TIGHT]  91.69,106.68 270 top